# Altium PCB BugBuster_DAQ.PcbDoc (part 1 of 5)
Units mm, origin at the board's own origin, x right, y up, seen from the top; angles counter-clockwise.
Board outline 110 x 80 mm, 6 copper layers (Top Layer, Inner Layer 1, Inner Layer 2, Inner Layer 3, Inner Layer 4, Bottom Layer), stack 1.202 mm thick; 245 components, 205 nets, 1250 pads, 1565 vias.
Unrouted connection lines stored in the file: 8.
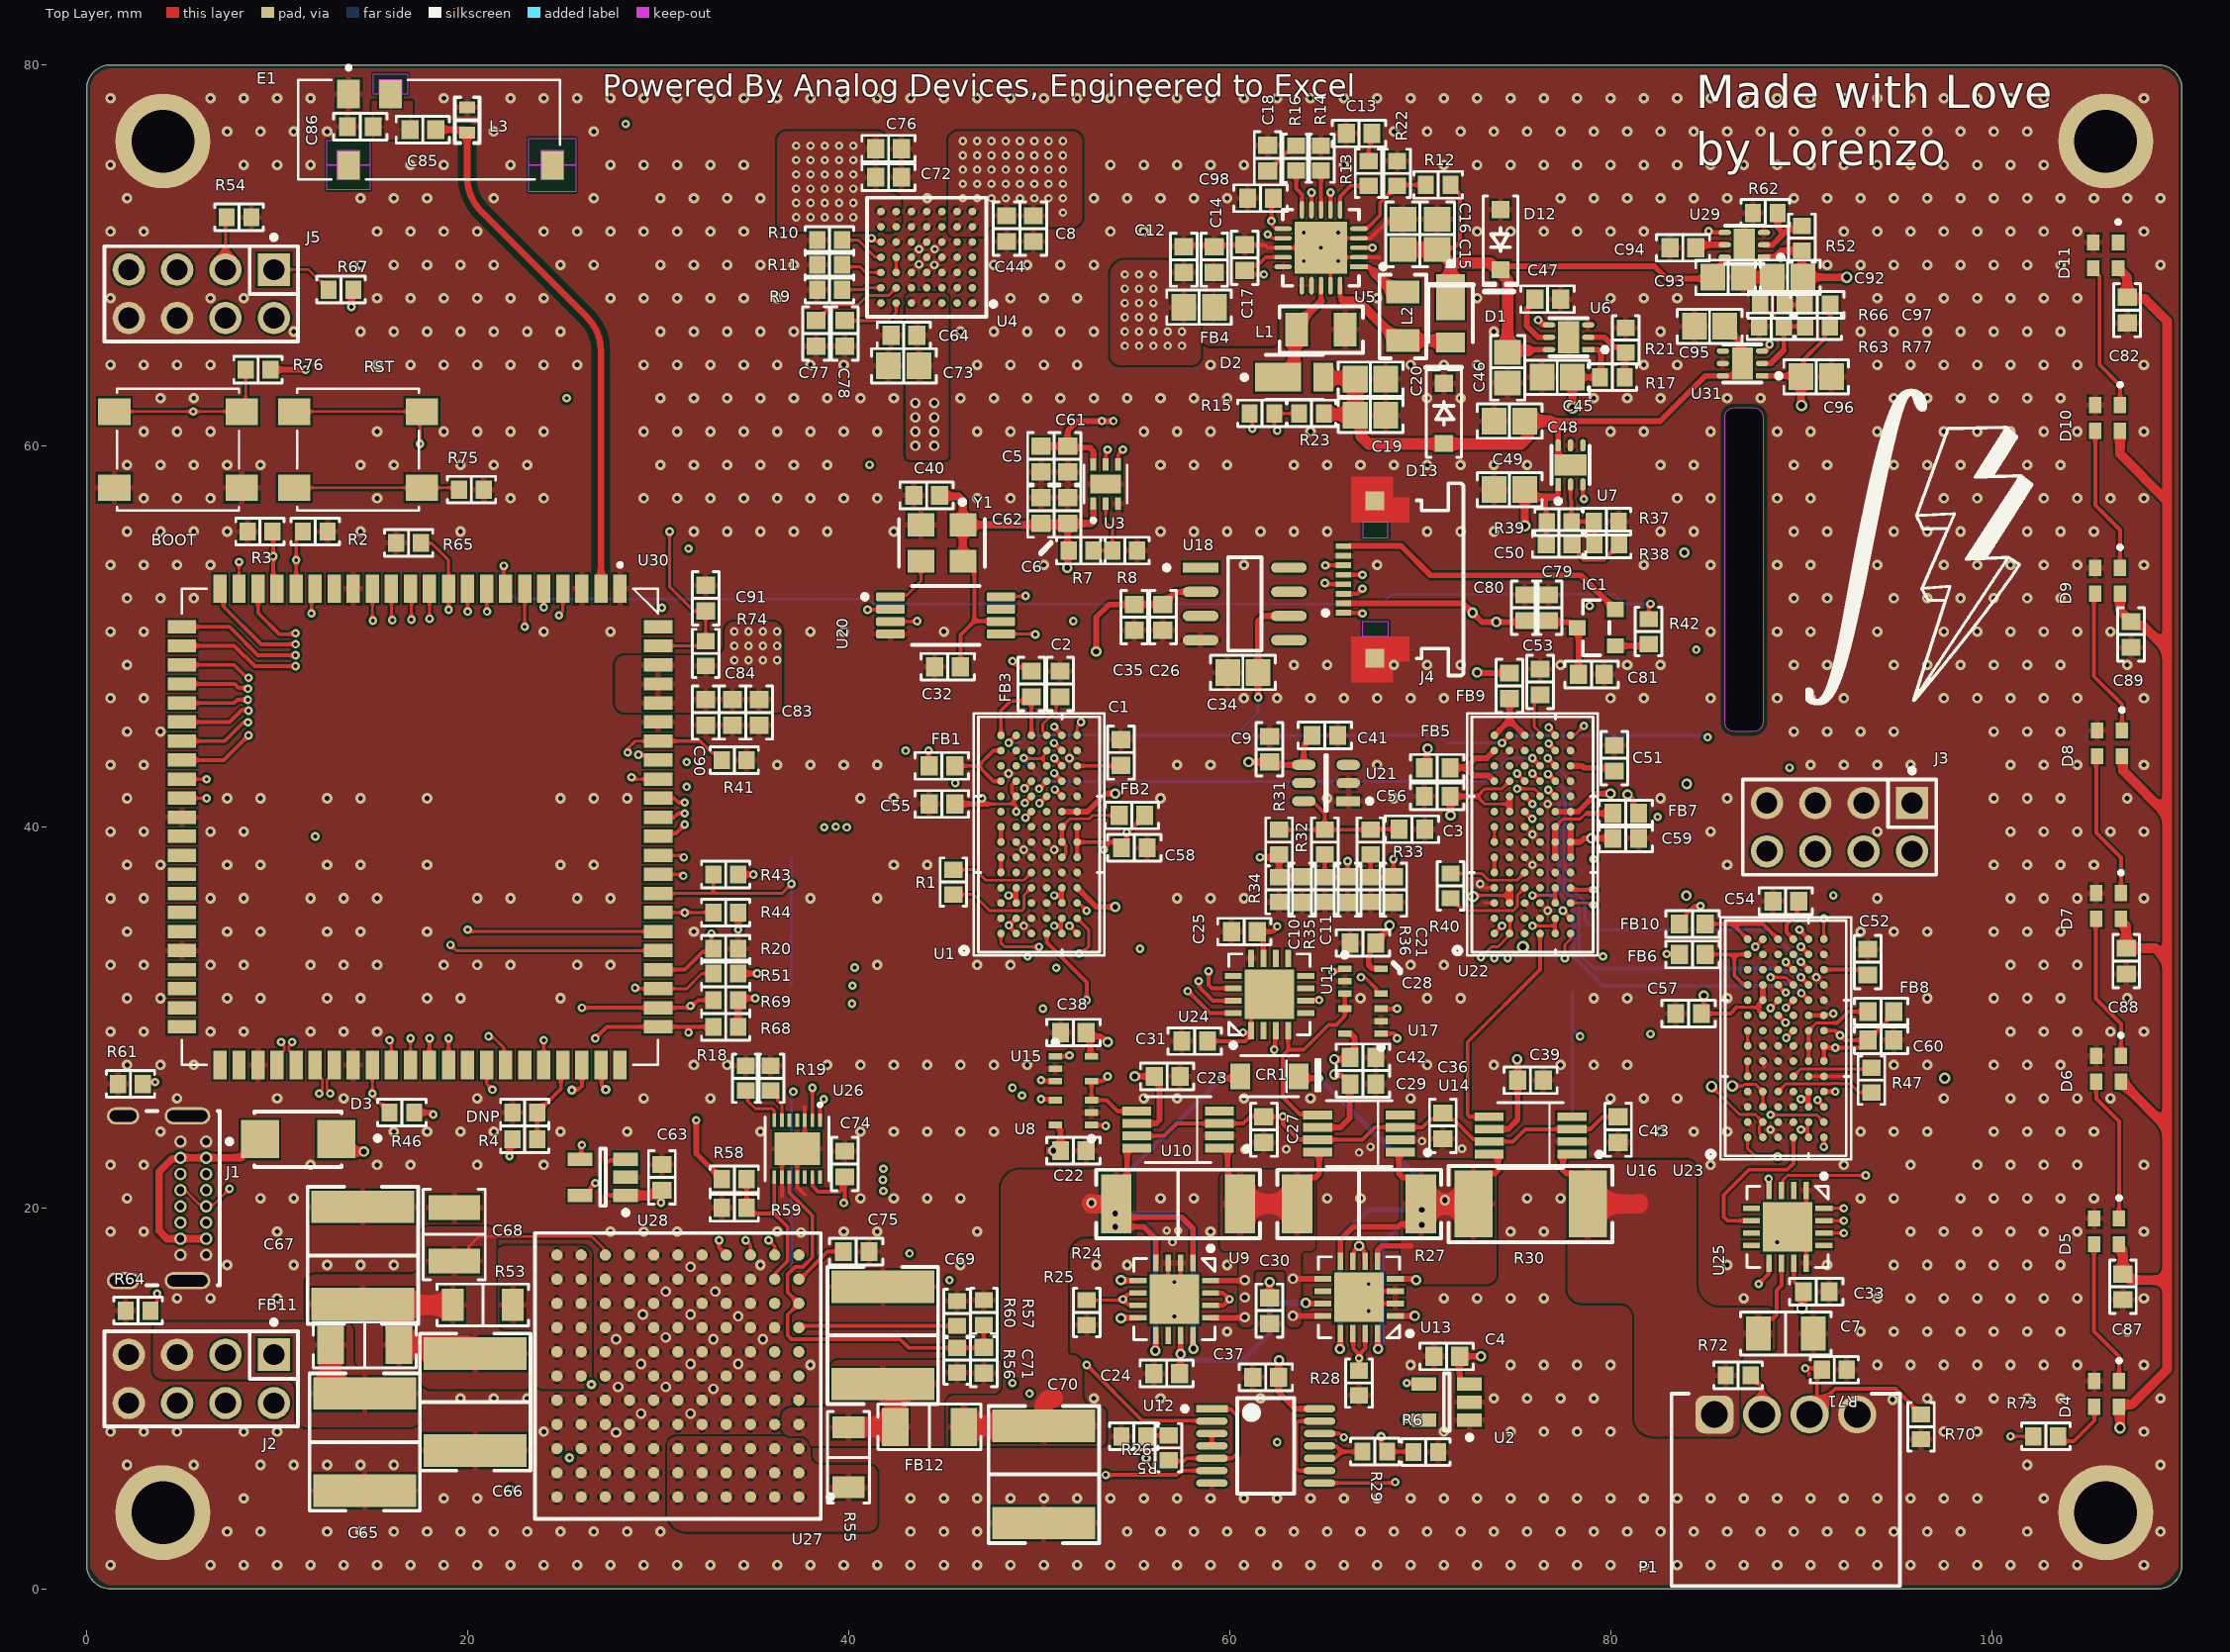
[diagram p0: Top Layer view]
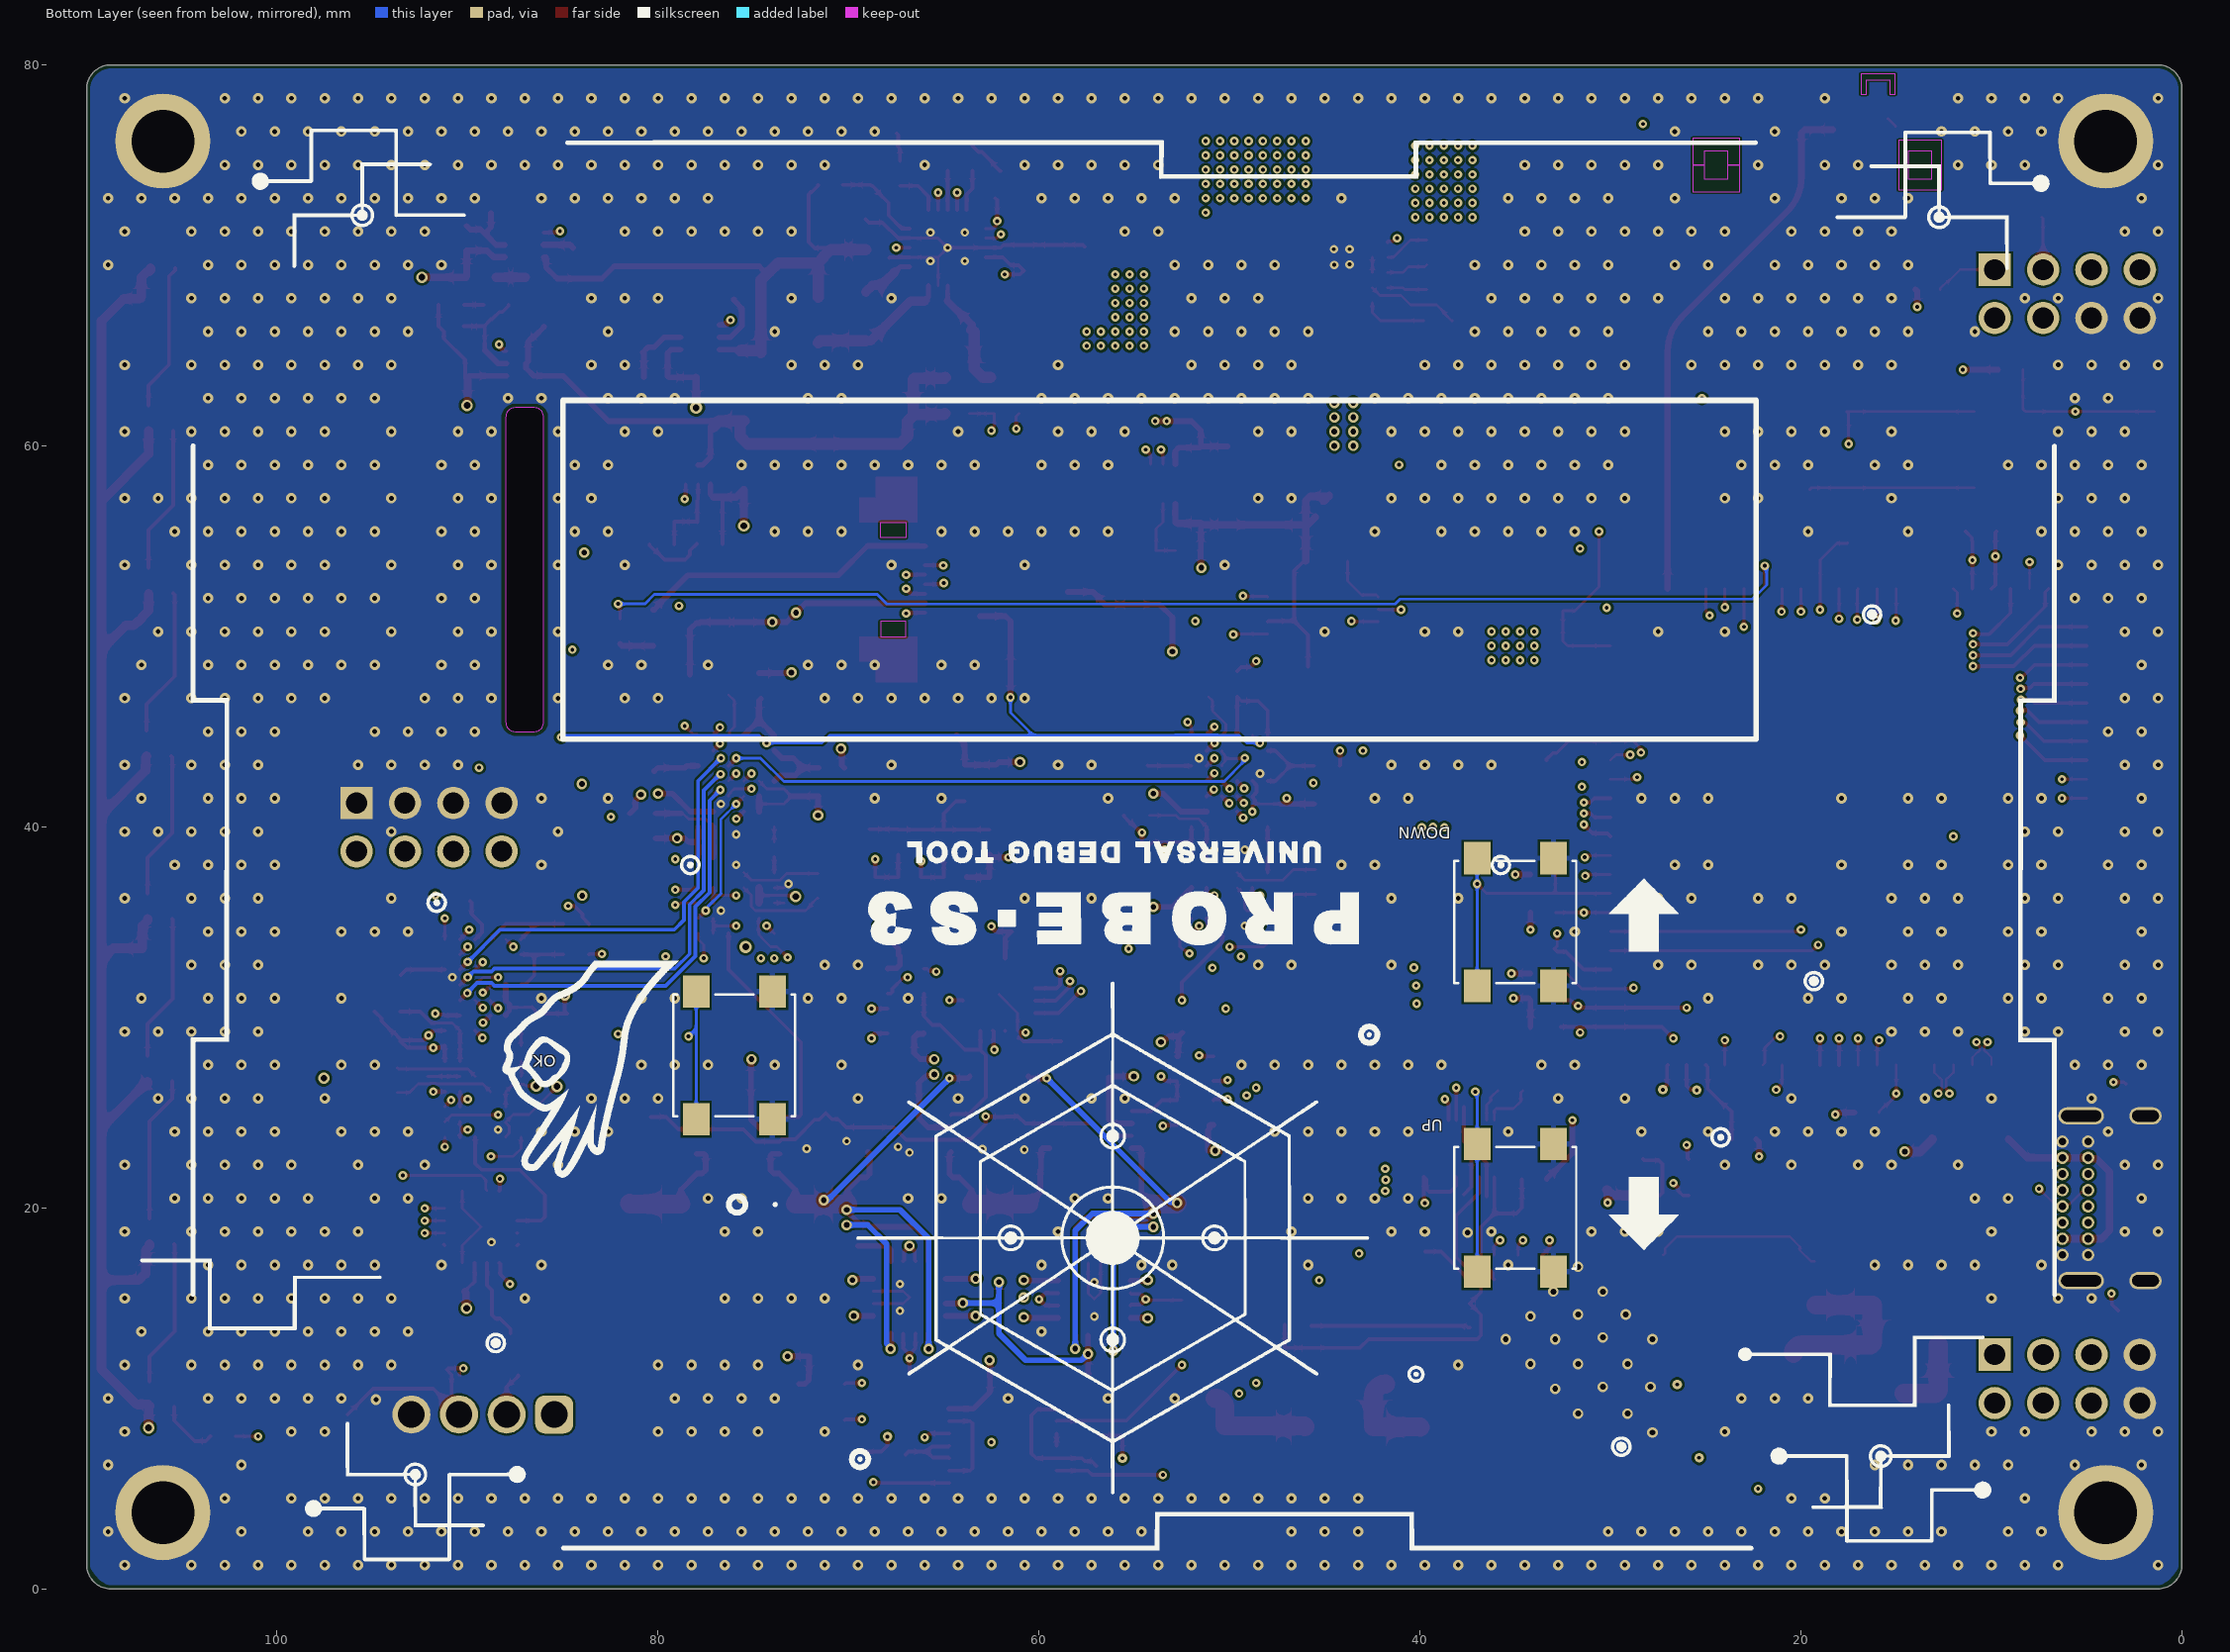
[diagram p1: Bottom Layer view, seen from below]
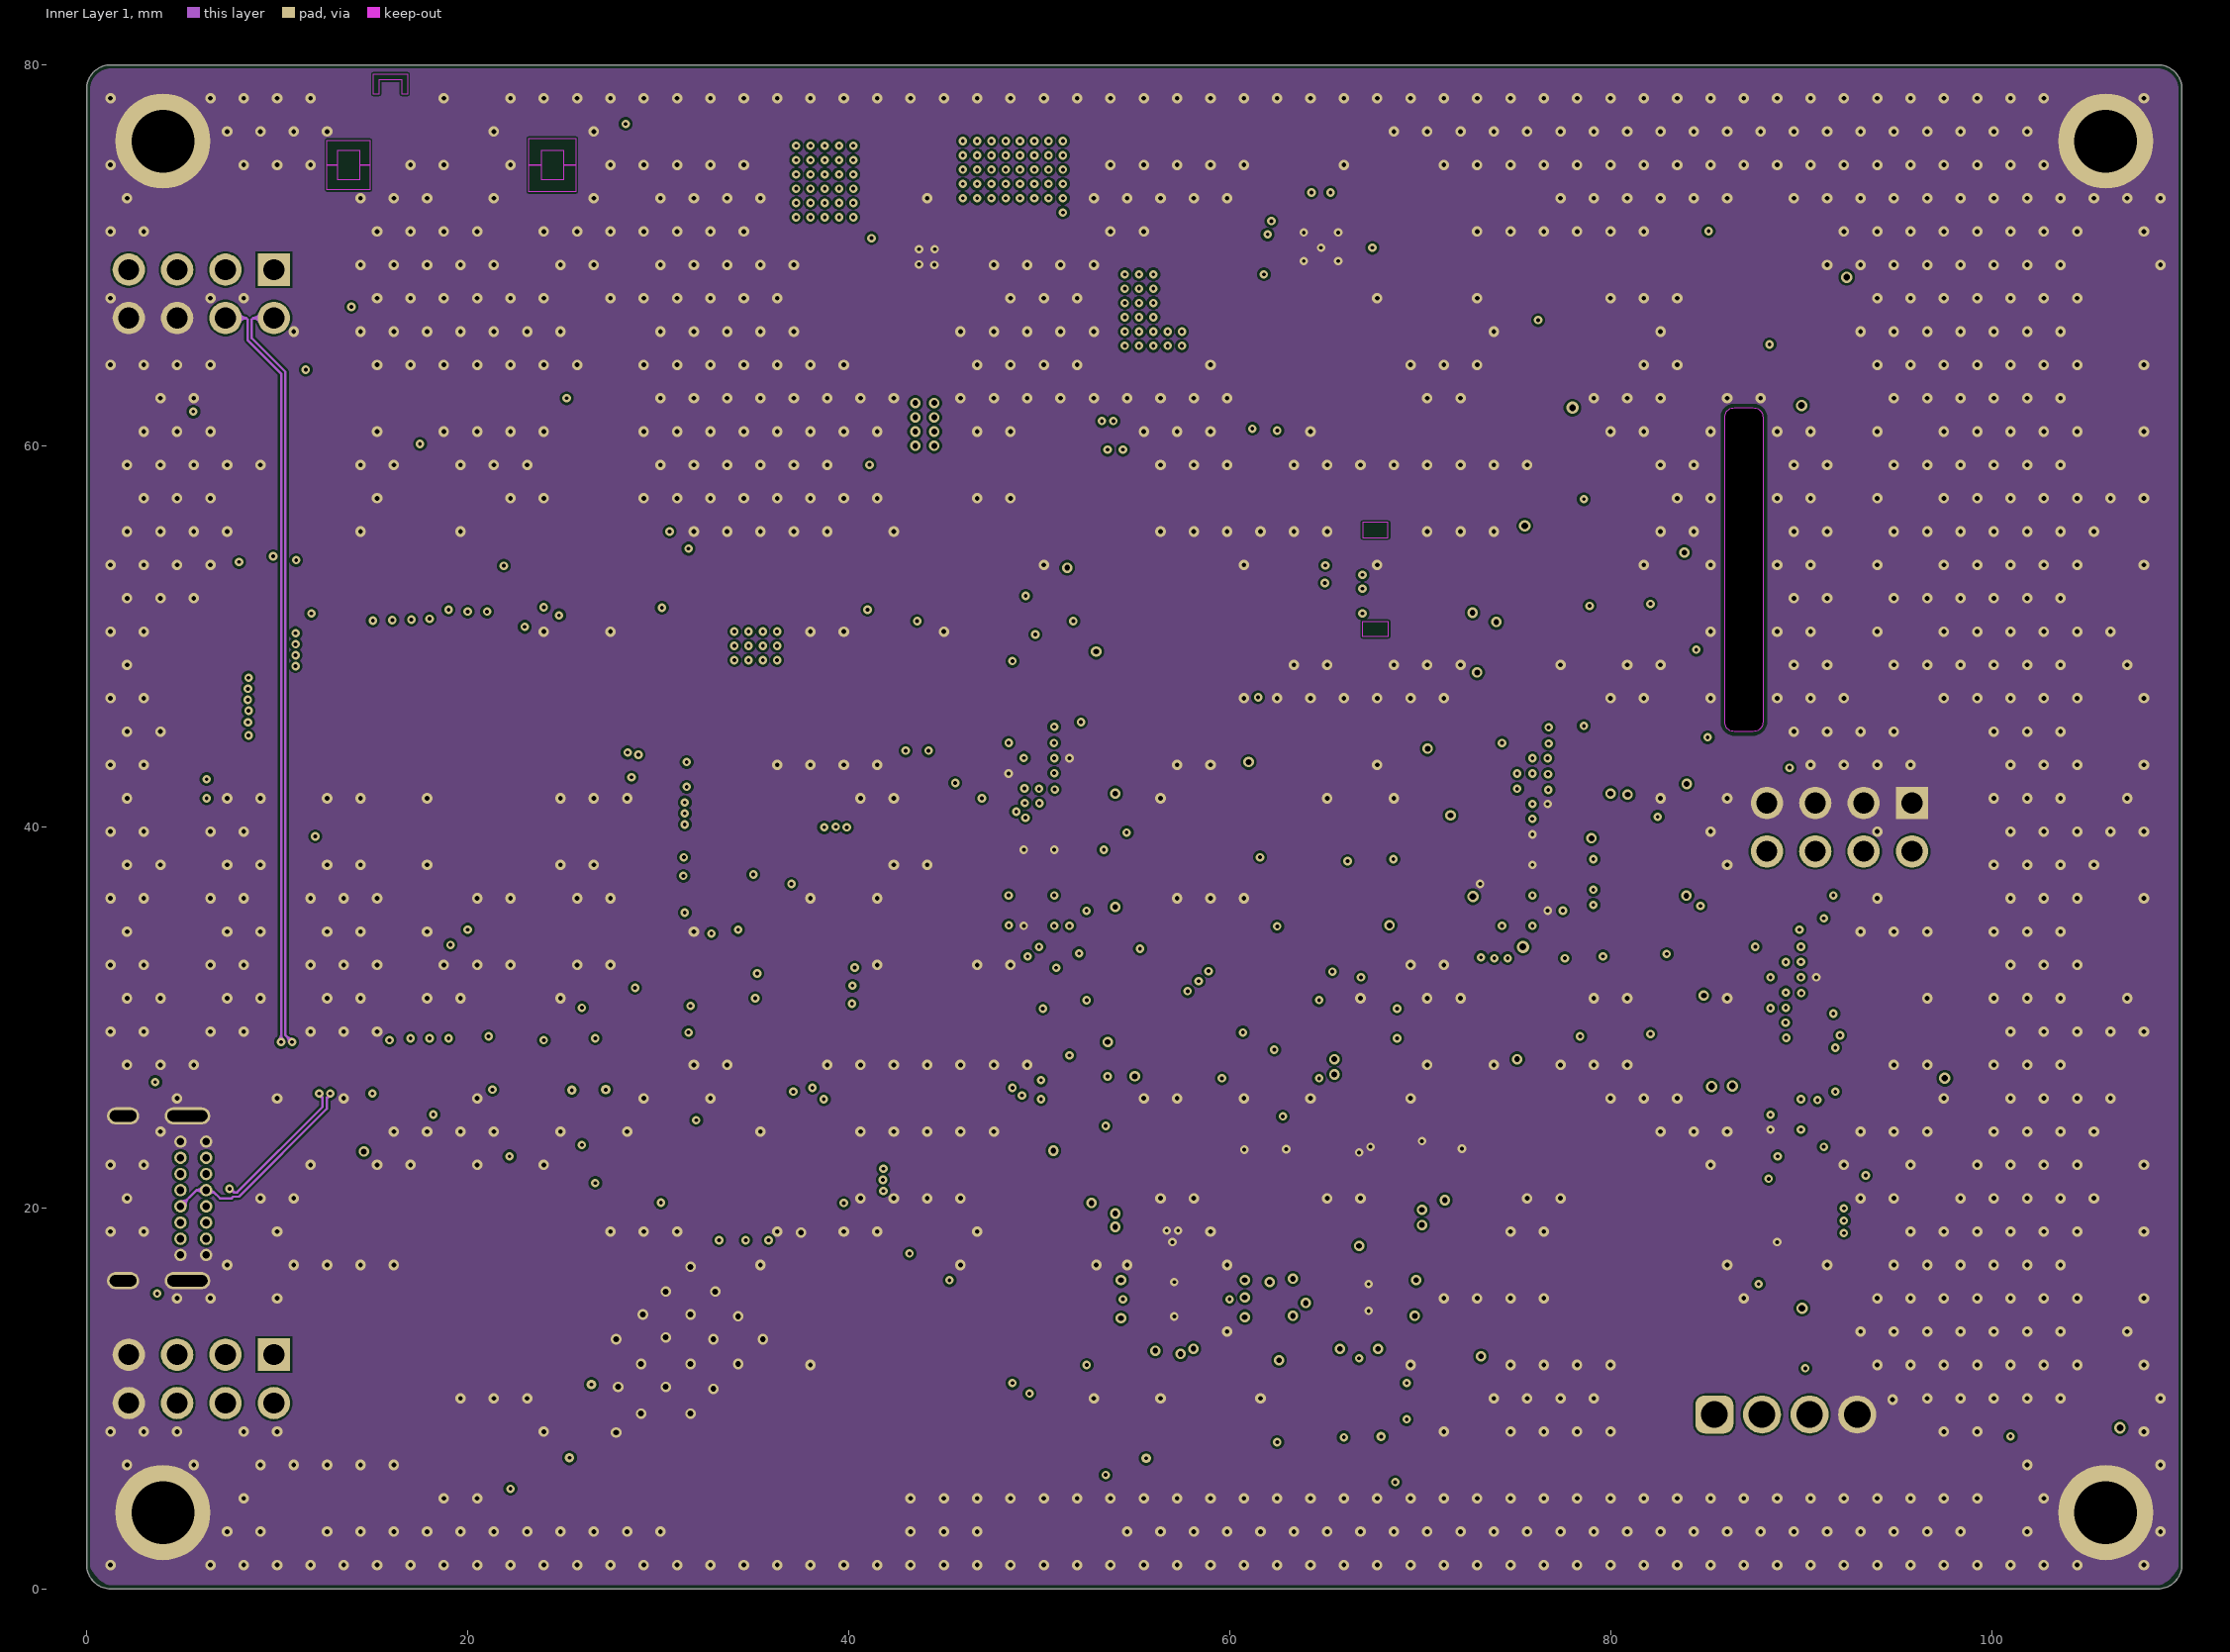
[diagram p2: Inner Layer 1]
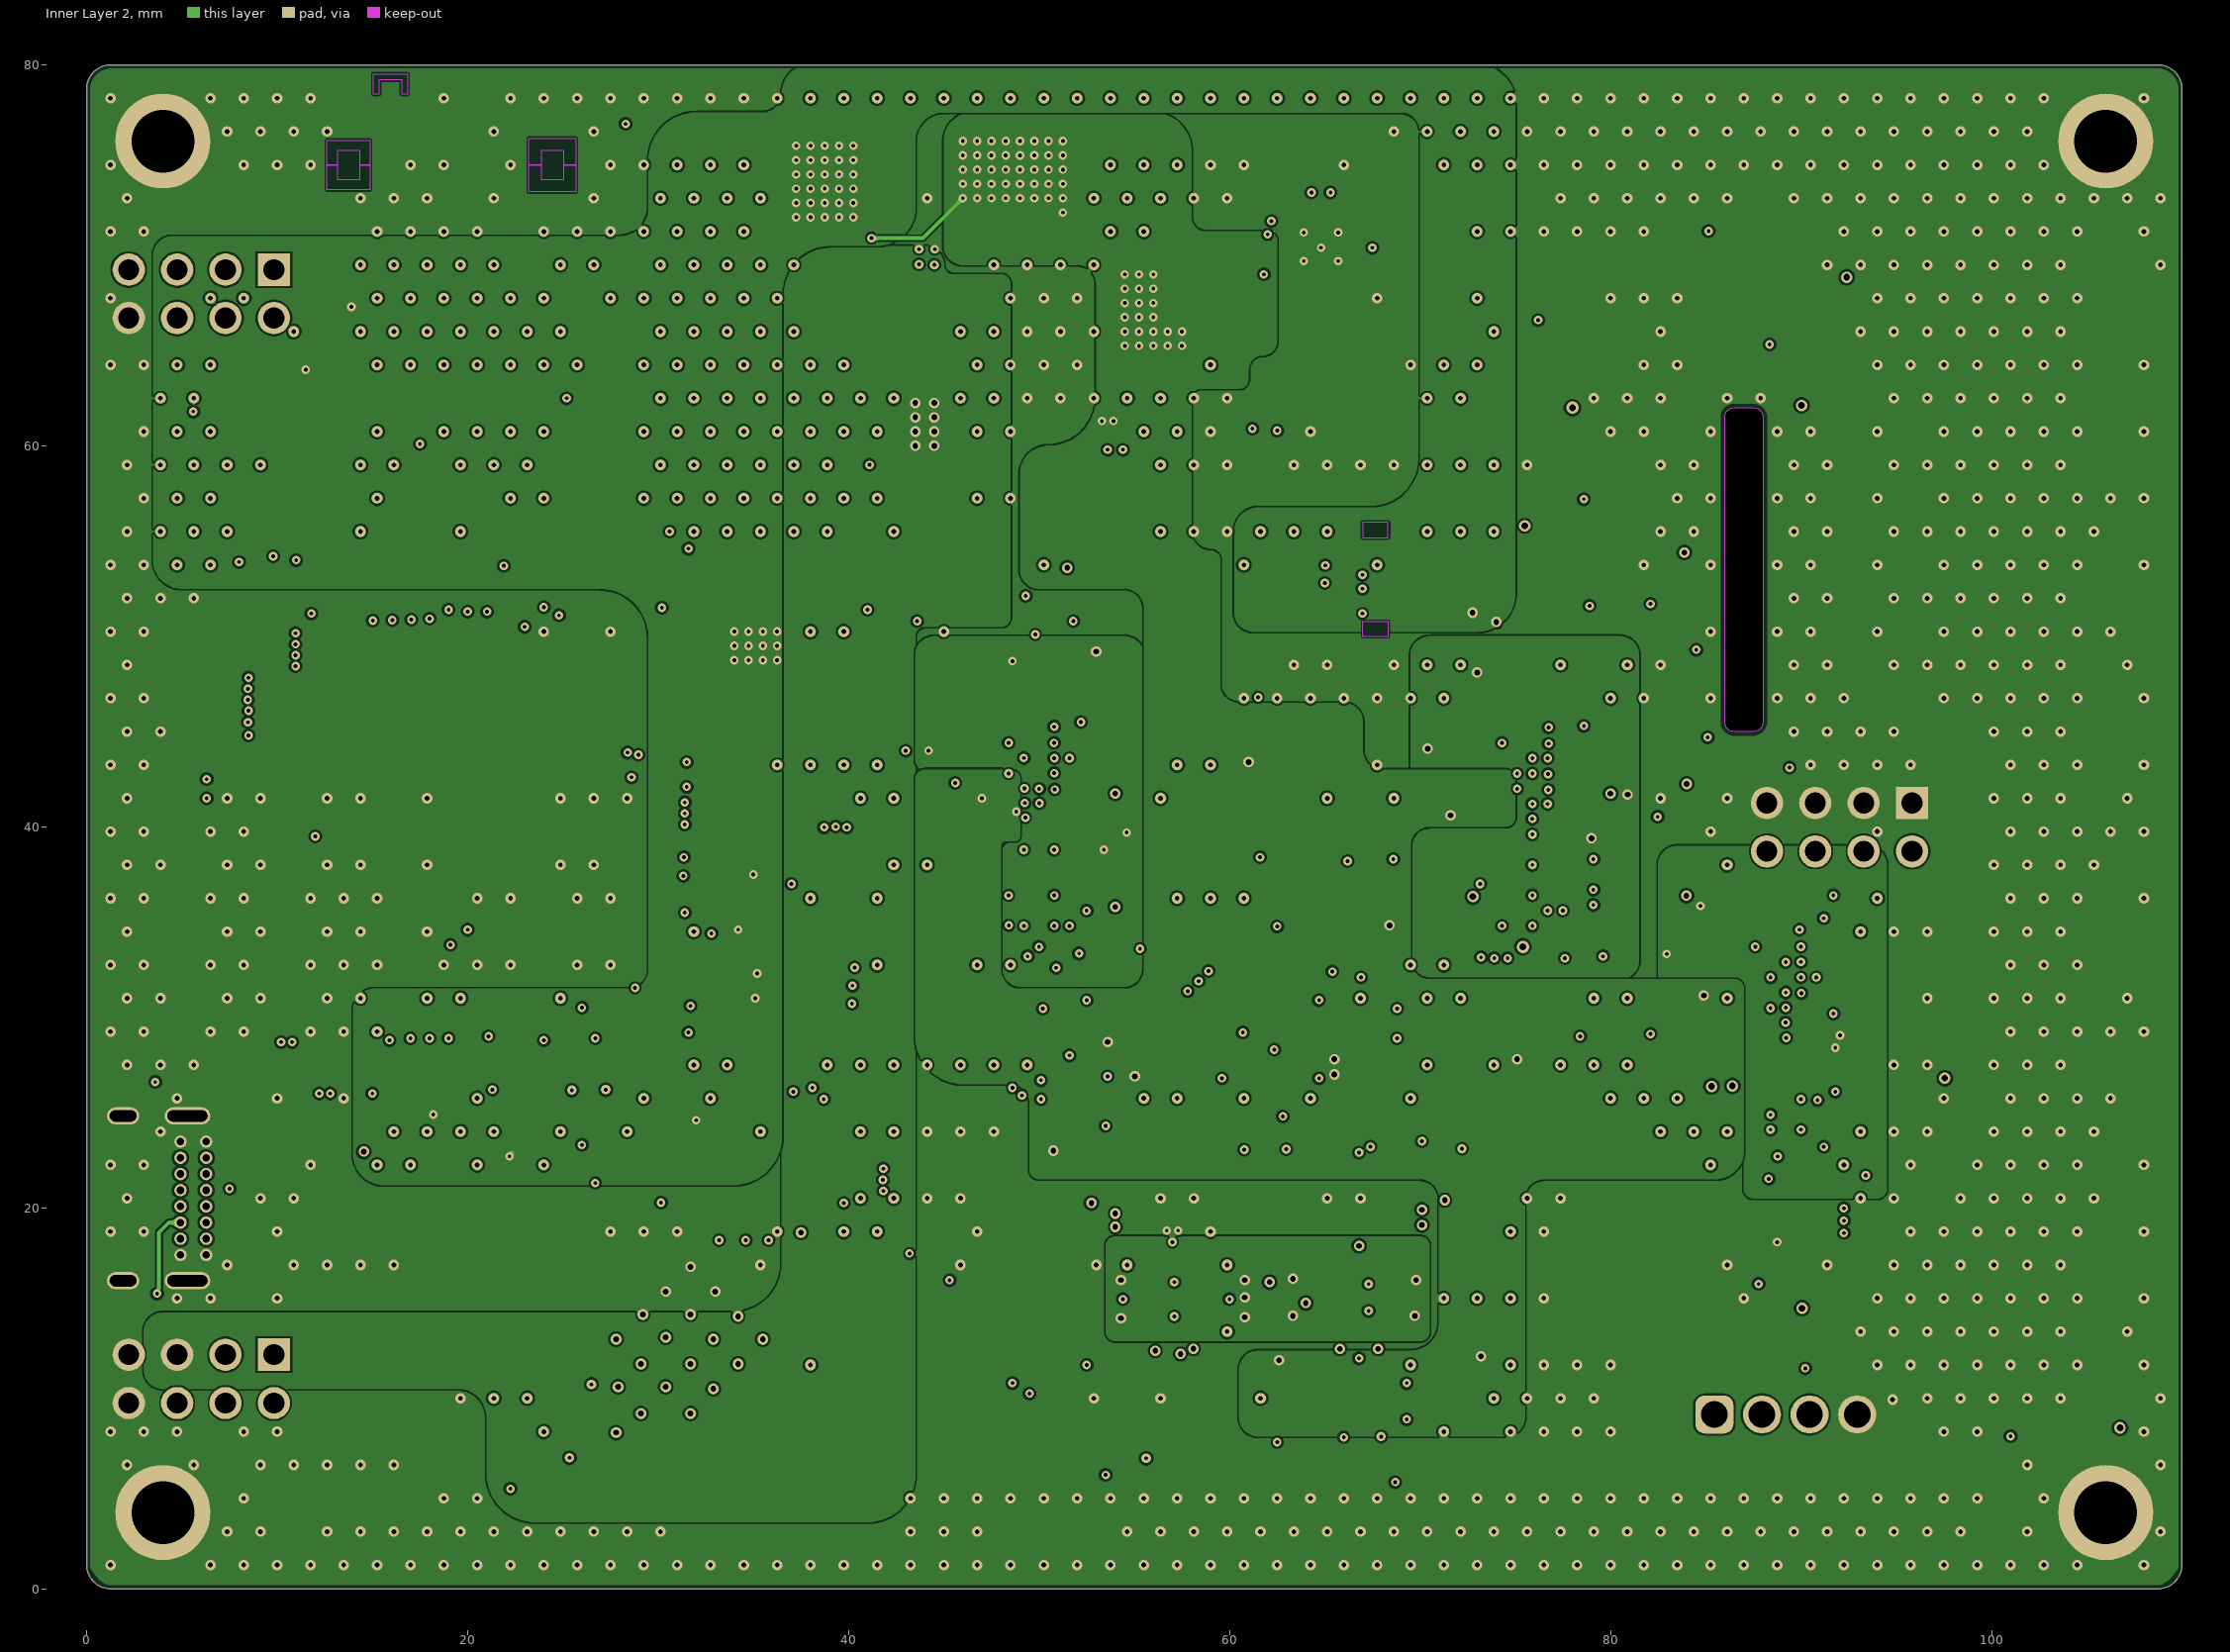
[diagram p3: Inner Layer 2]
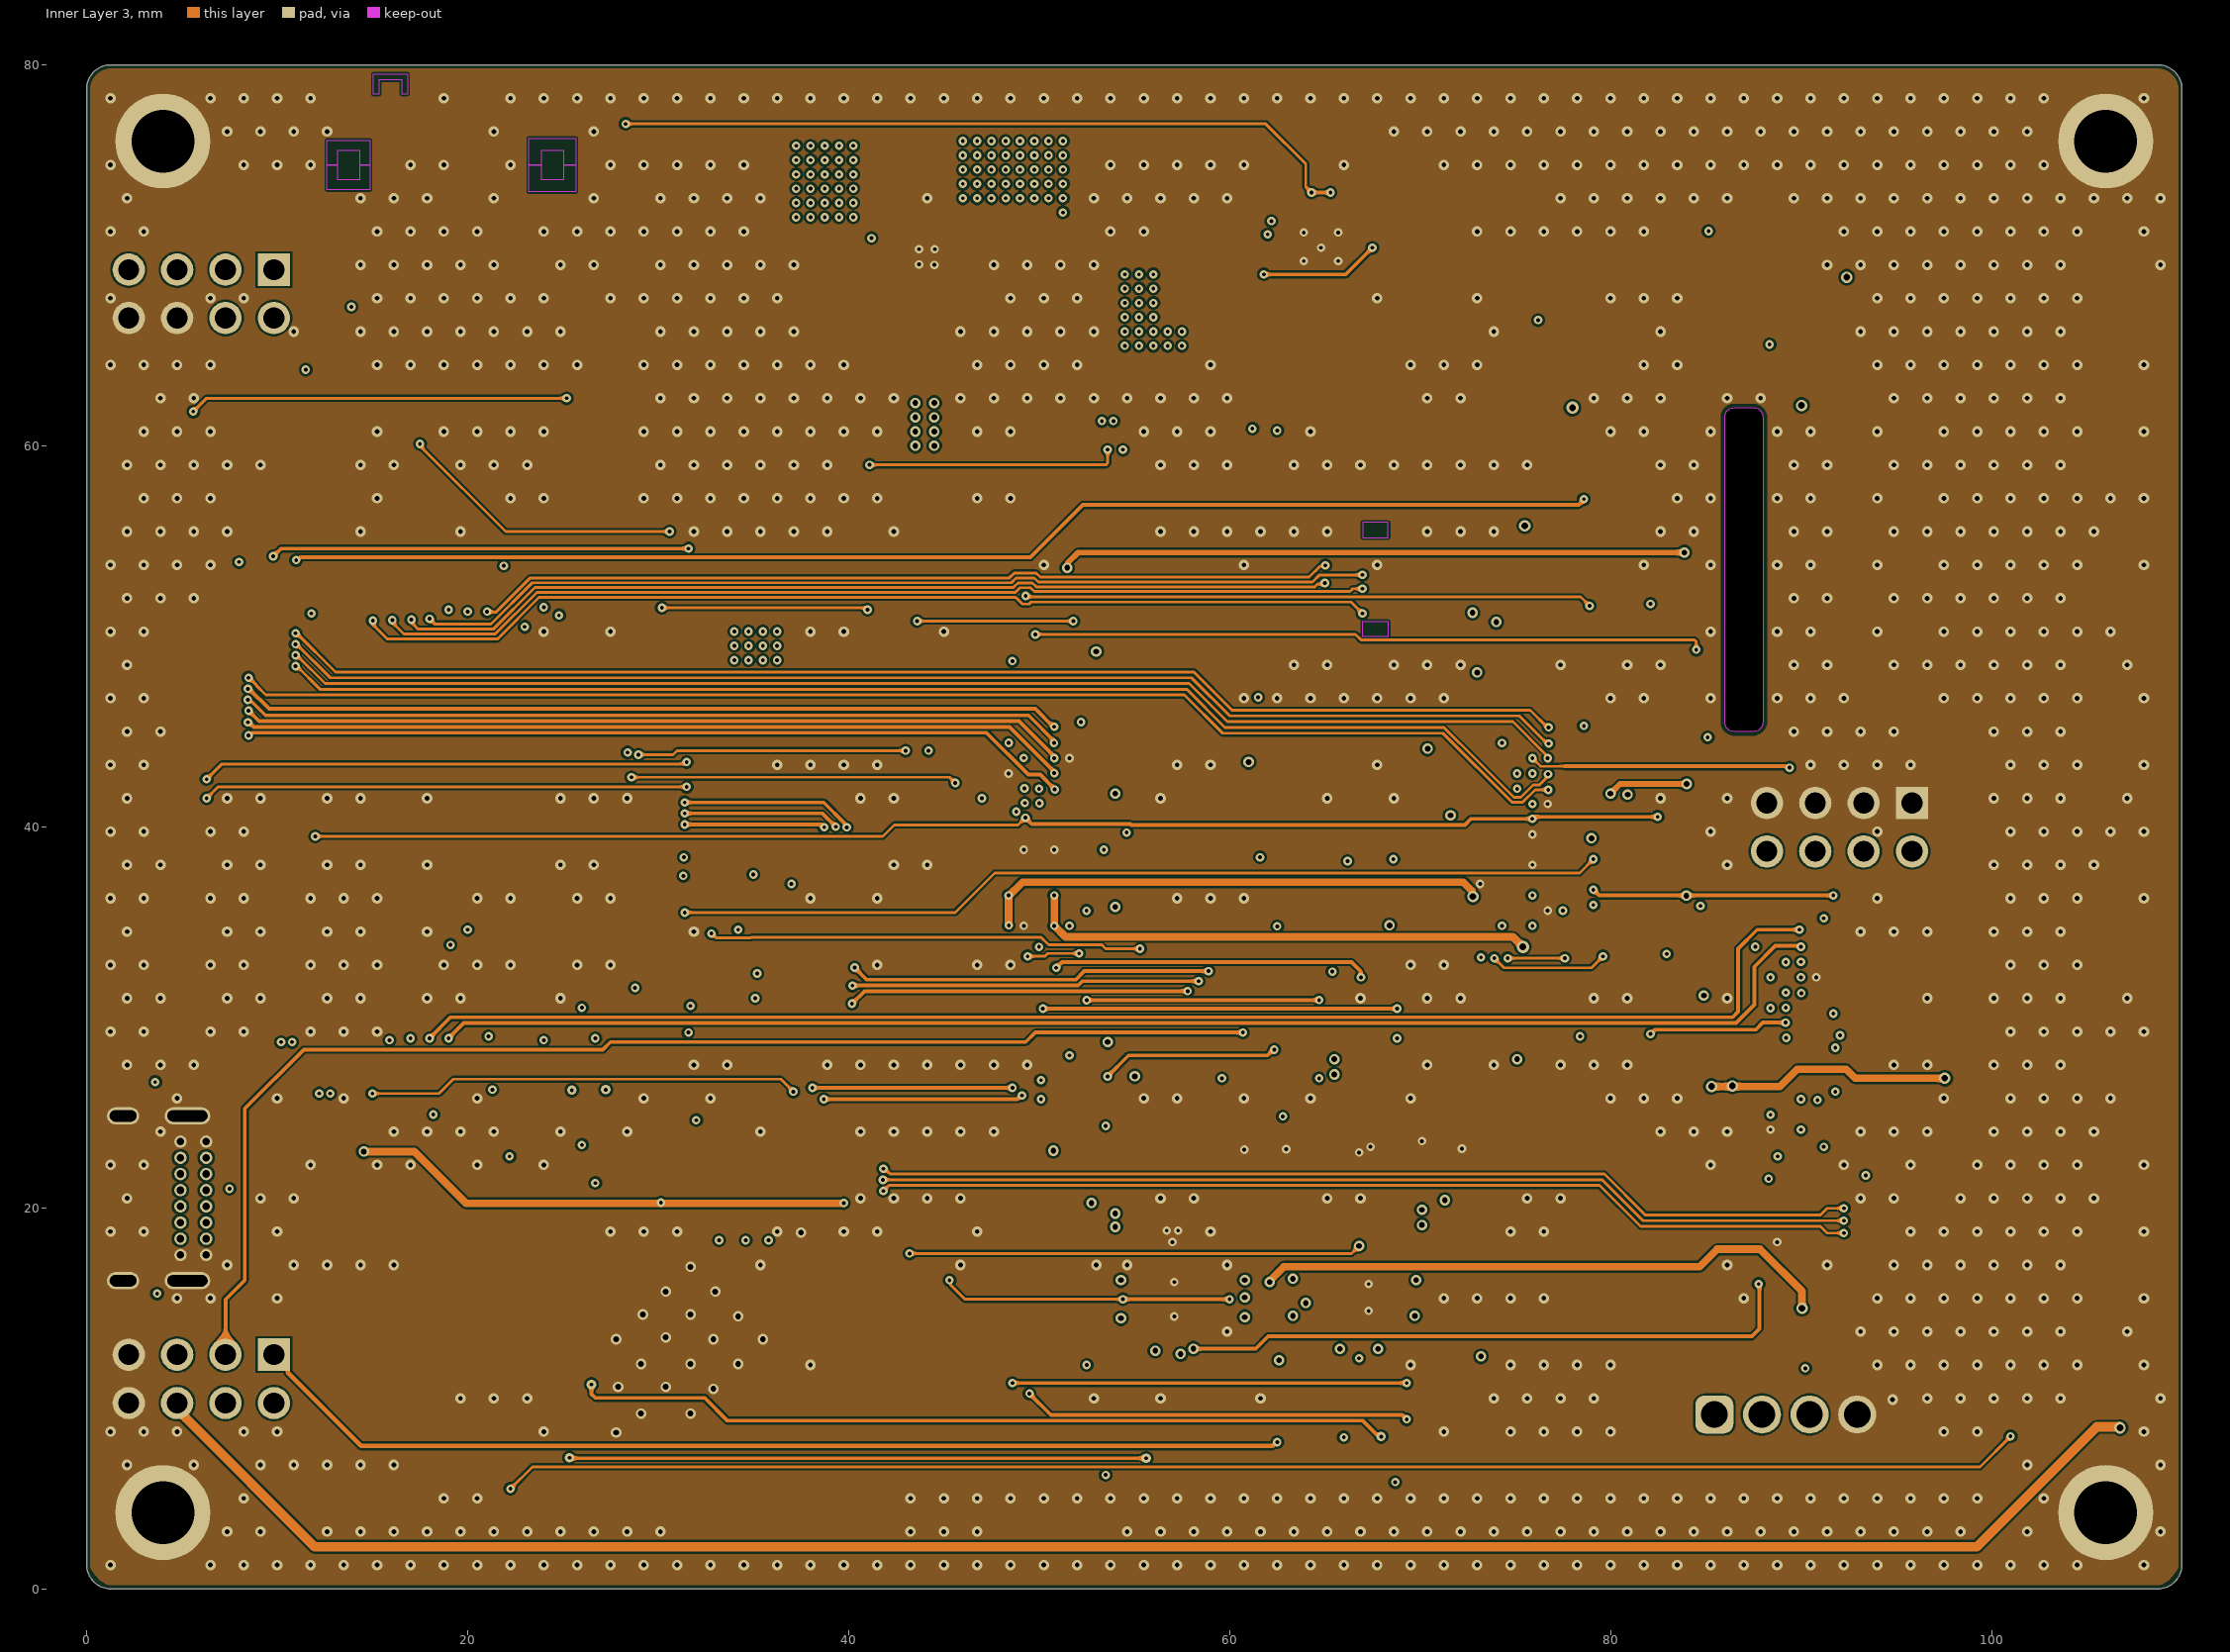
[diagram p4: Inner Layer 3]
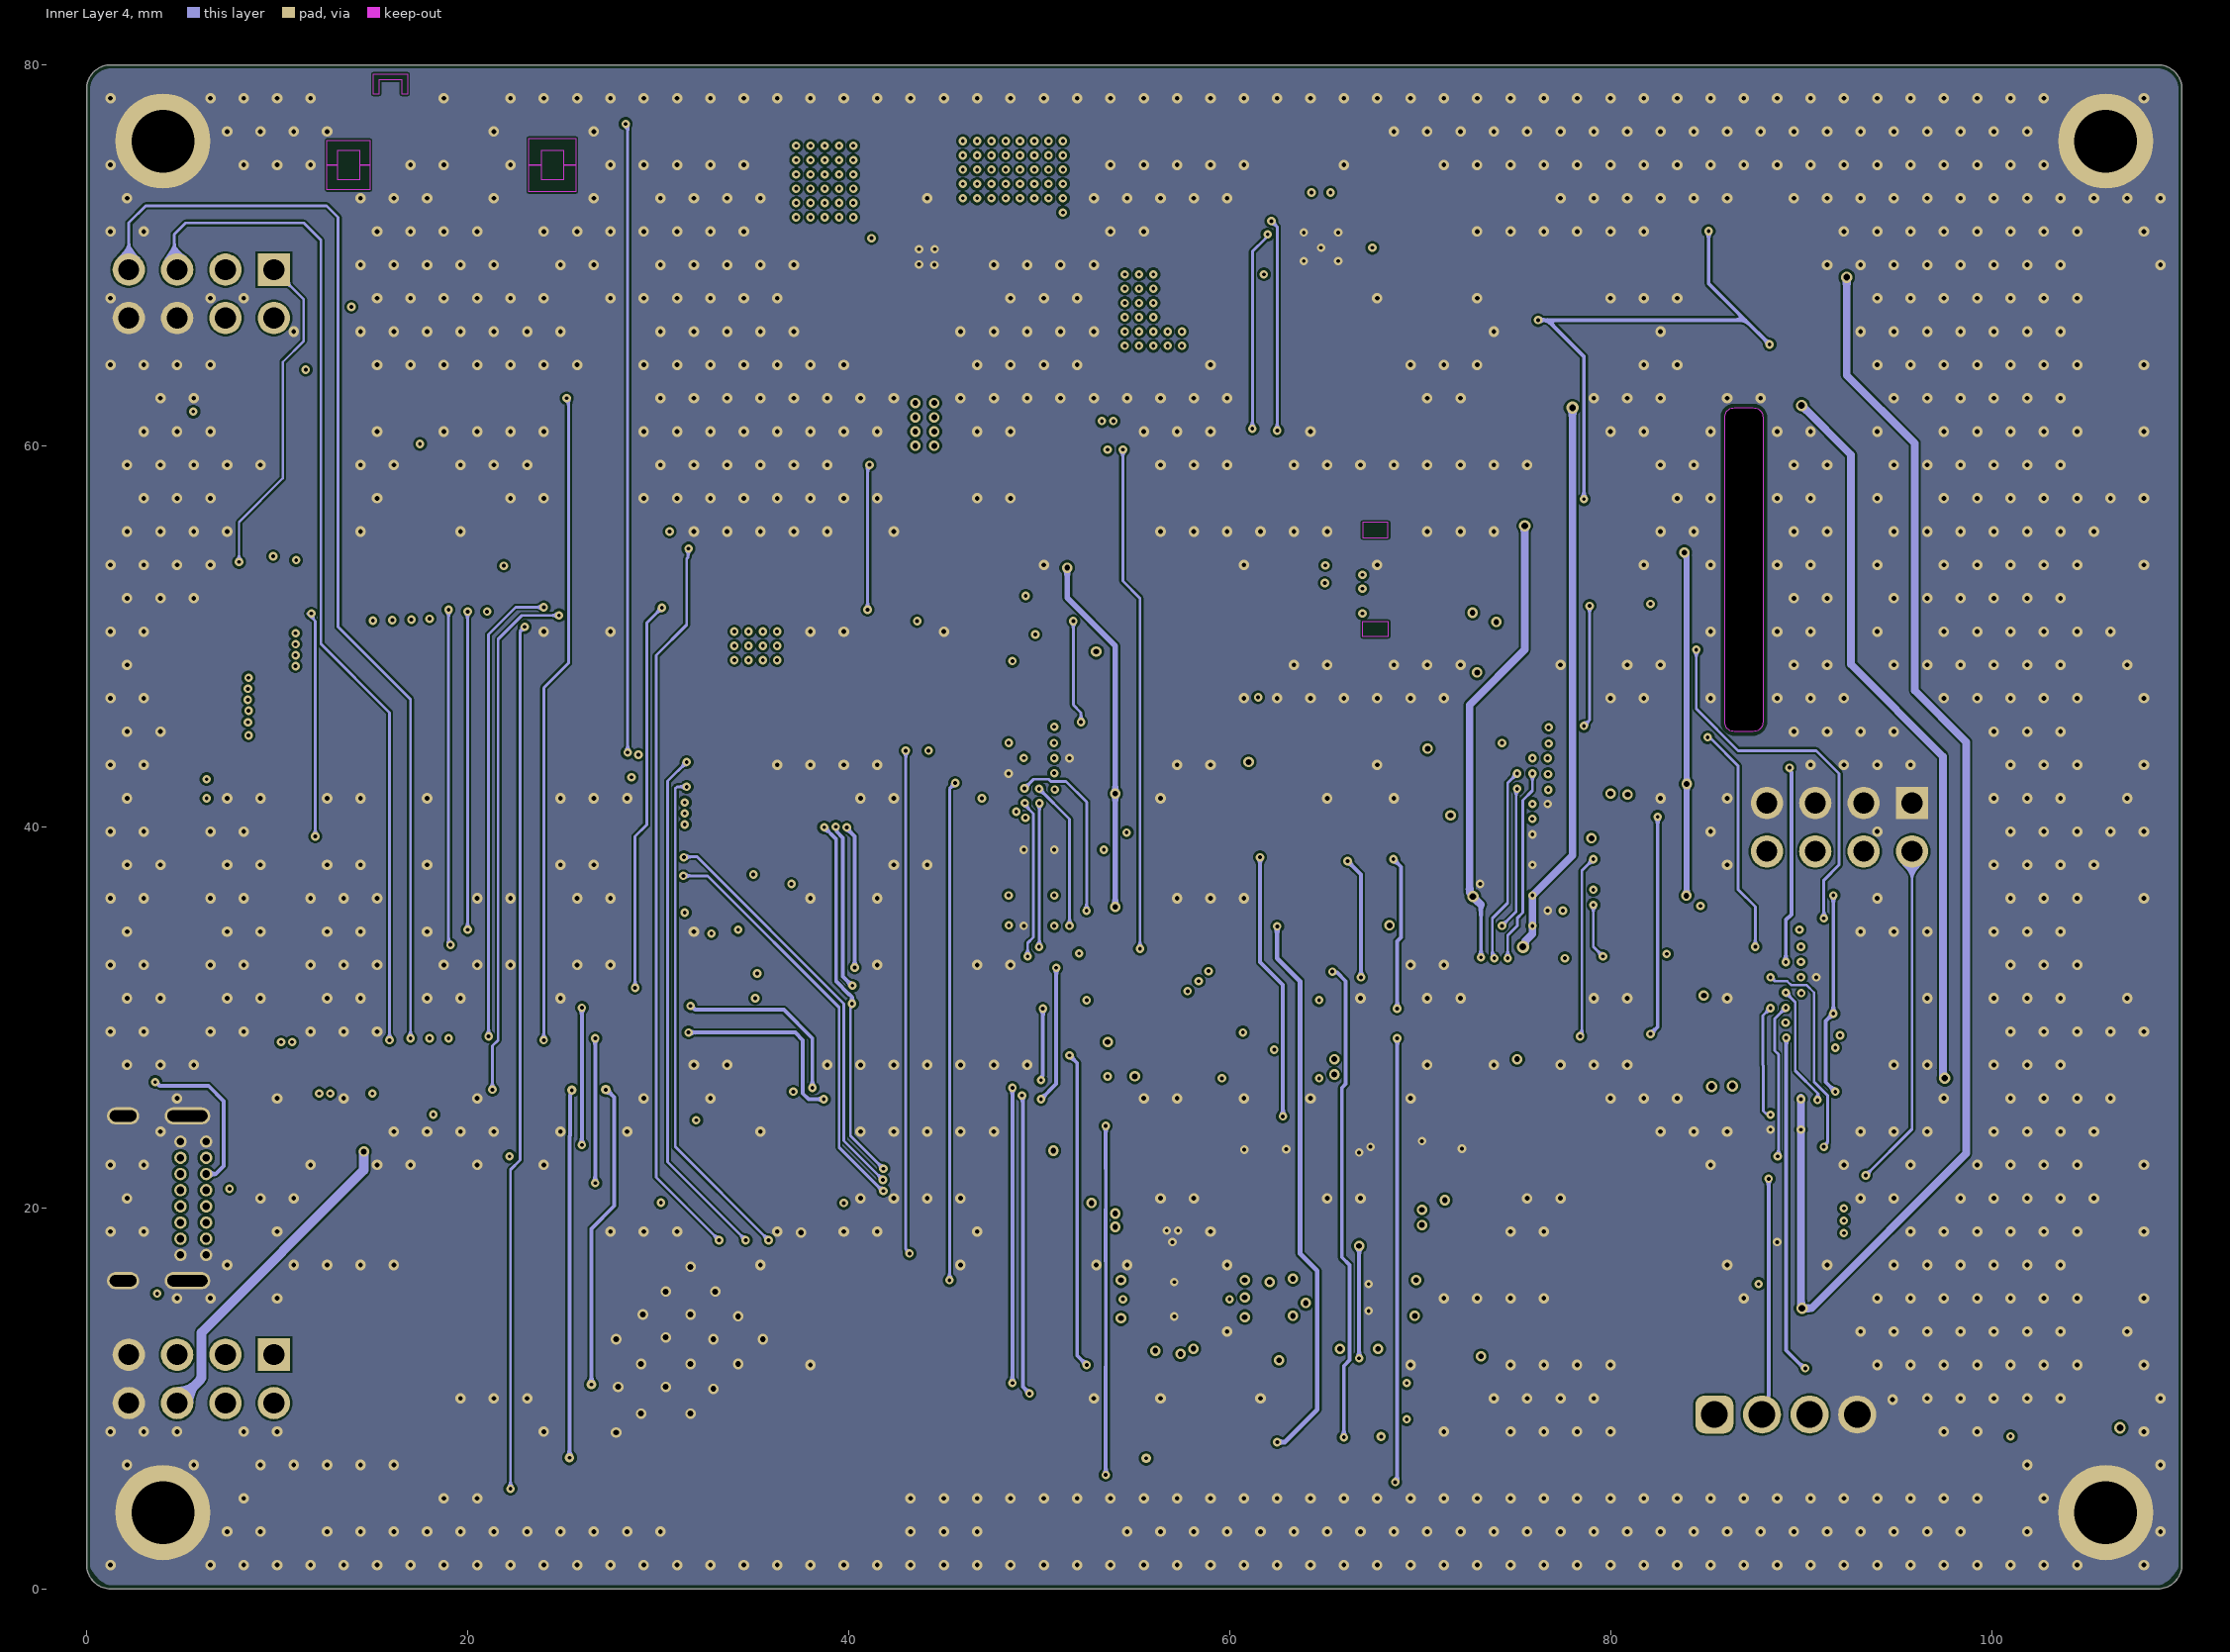
[diagram p5: Inner Layer 4]
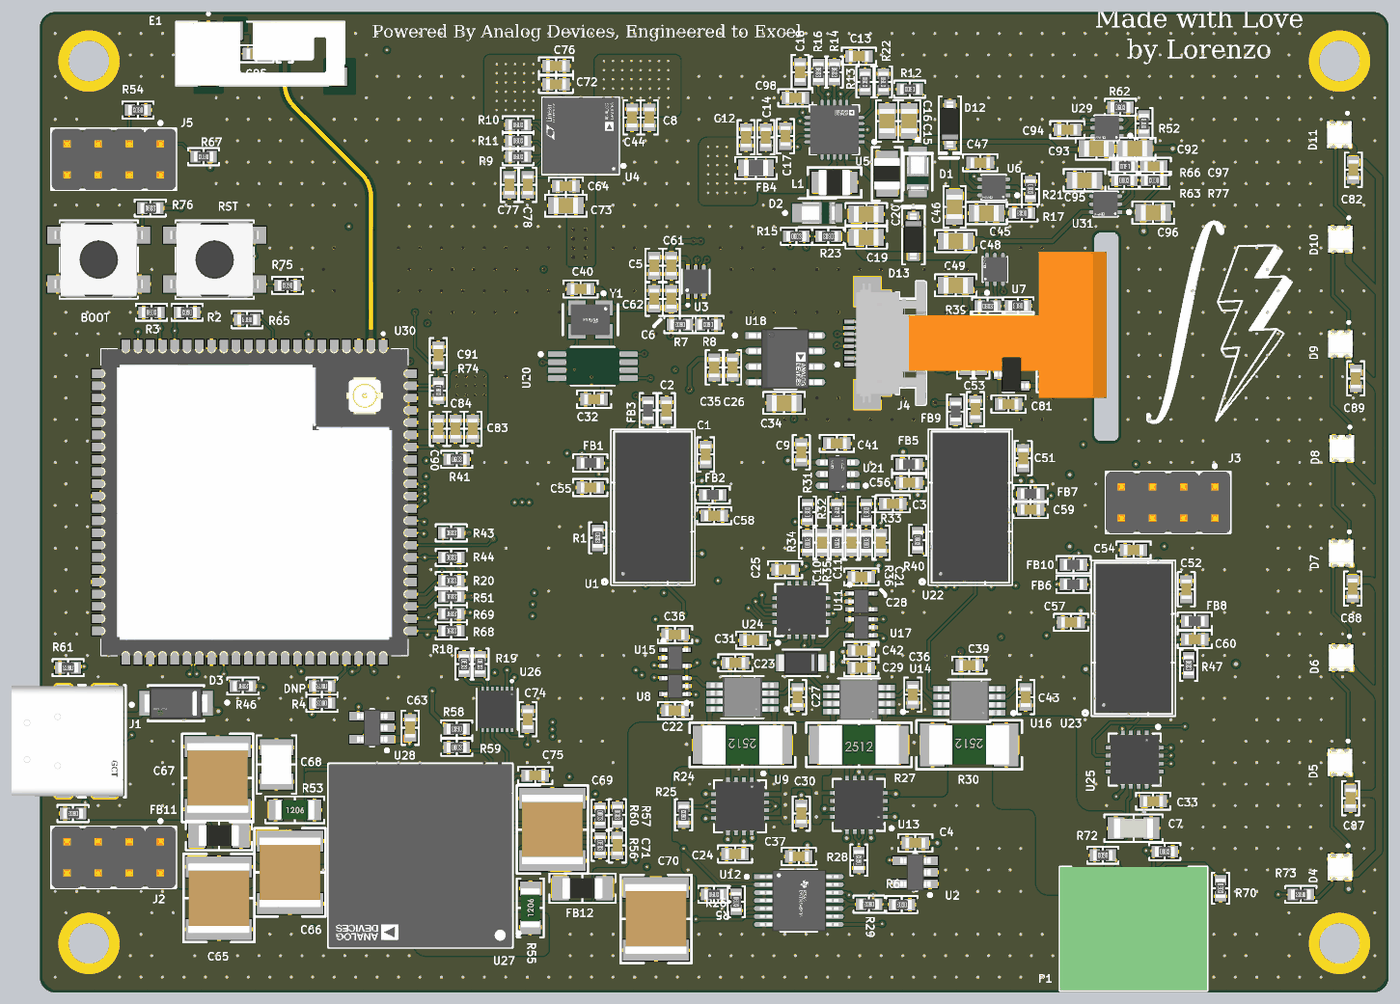
[diagram p9: 3D render of the assembled board from above, using the file's embedded part models]
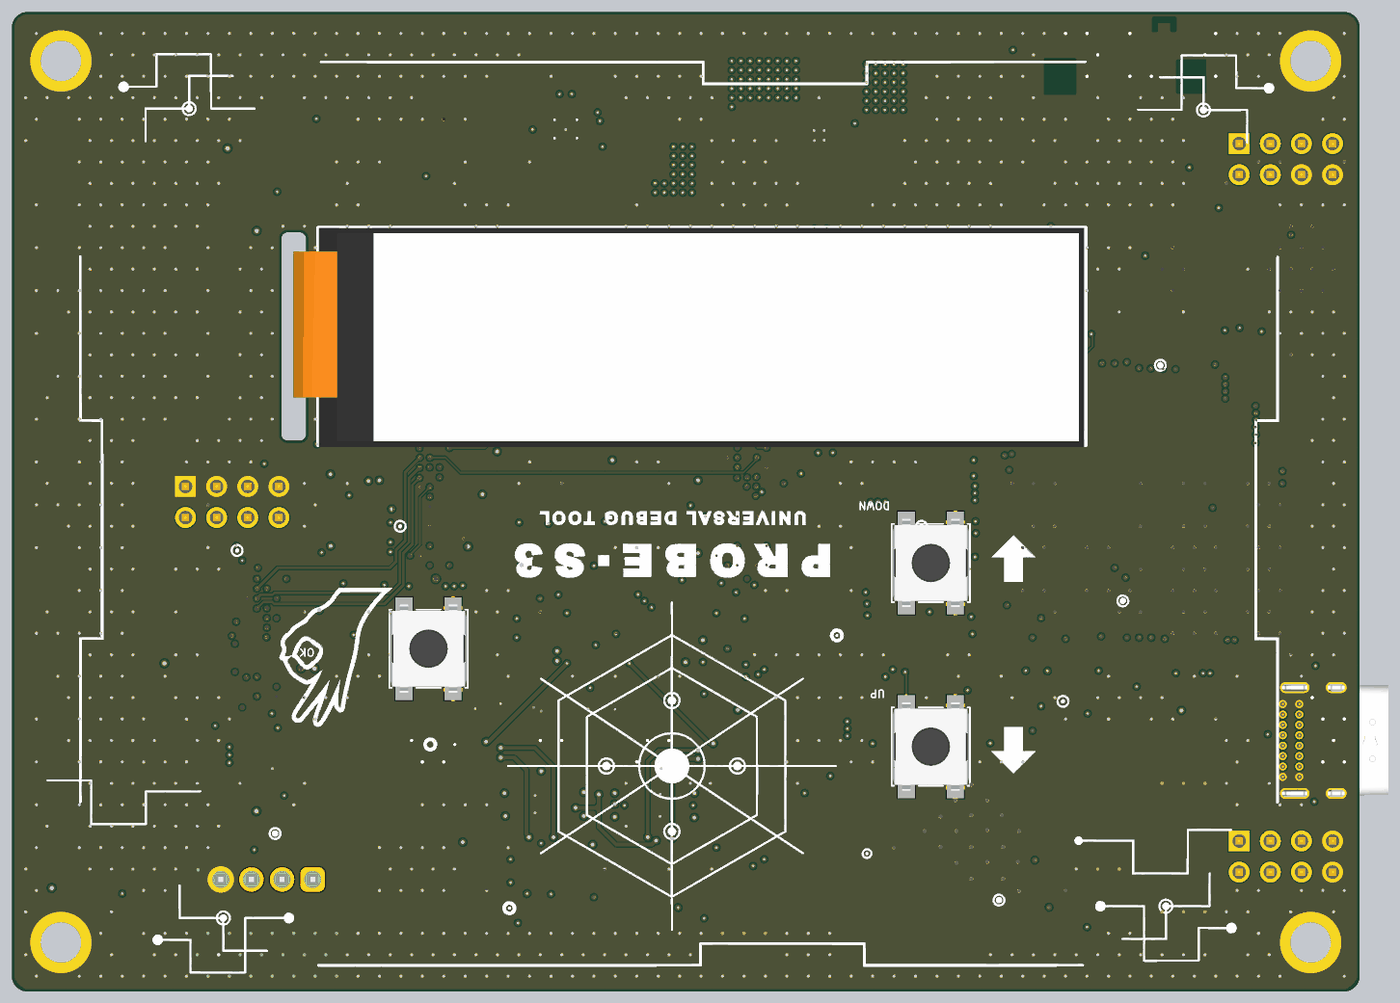
[diagram p10: 3D render of the assembled board from below, using the file's embedded part models]

## Layer stack, top to bottom
Top Solder: solder mask 0.0152, Solder Resist, Dk 3.8
Top Layer: signal copper 0.035
Dielectric 1: prepreg 0.203, NP-155F, Dk 4.4
Inner Layer 1: signal copper 0.03
Dielectric 2: core 0.1, NP-155F, Dk 4.6
Inner Layer 2: signal copper 0.03
Dielectric 3: prepreg 0.203, NP-155F, Dk 4.4
Dielectric 6: prepreg 0.203, NP-155F, Dk 4.4
Inner Layer 3: signal copper 0.03
Dielectric 4: core 0.1, NP-155F, Dk 4.6
Inner Layer 4: signal copper 0.03
Dielectric 5: prepreg 0.203, NP-155F, Dk 4.4
Bottom Layer: signal copper 0.035
Bottom Solder: solder mask 0.0152, Solder Resist, Dk 3.8

## Board outline
1.27,0 cw(c1.27,1.27) 0,1.27 0,78.73 cw(c1.27,78.73) 1.27,80 108.73,80 cw(c108.73,78.73) 110,78.73 110,1.27 cw(c108.73,1.27) 108.73,0

## Design rules (kind name [scope] priority, off if disabled: settings)
BoardOutlineClearance [All] p1: gap=0.2 ignorepadtopadclearanceinfootprint=FALSE
Clearance Clearance_1 [InNet('NetC85_2')] p1: gap=0.102 ignorepadtopadclearanceinfootprint=FALSE except(0.127: Arc-Via Track-Via SMDPad-Via THPad-Via Via-Via Via-Fill Via-Poly Via-Region Via-Text; 0.25: Arc-Hole Track-Hole SMDPad-Hole THPad-Hole Via-Hole Fill-Hole Poly-Hole Region-Hole Text-Hole; 0.3: Arc-Fill Arc-Poly Arc-Region Track-Fill Track-Poly Track-Region)
Clearance "Stitching GND" [IsStitchingVia and InNet('GND') vs (IsVia and (Not IsStitchingVia)) Or IsPad] p2: gap=0.2 ignorepadtopadclearanceinfootprint=FALSE
Clearance [All] p3: gap=0.102 ignorepadtopadclearanceinfootprint=FALSE except(0.127: Arc-Via Track-Via SMDPad-Via THPad-Via Via-Via Via-Fill Via-Poly Via-Region Via-Text; 0.25: Arc-Hole Track-Hole SMDPad-Hole THPad-Hole Via-Hole Fill-Hole Poly-Hole Region-Hole Text-Hole)
ComponentClearance [All] p1: gap=0.102 collisioncheckmode=3 verticalgap=0.102 showdistances=TRUE
DiffPairsRouting [All] p1: maxlimit=0.102 minlimit=0.102 mostfreqgap=0.102 toplayer_minwidth=0.102 toplayer_maxwidth=1816.048 toplayer_prefwidth=0.102 midlayer1_minwidth=0.102 midlayer1_maxwidth=1816.048 midlayer1_prefwidth=0.102 midlayer2_minwidth=0.102 midlayer2_maxwidth=1816.048 midlayer2_prefwidth=0.102 midlayer3_minwidth=0.102 midlayer3_maxwidth=1816.048 midlayer3_prefwidth=0.102 midlayer4_minwidth=0.102 midlayer4_maxwidth=1816.048 midlayer4_prefwidth=0.102 bottomlayer_minwidth=0.102 bottomlayer_maxwidth=1816.048 bottomlayer_prefwidth=0.102 maxuncoupledlength=12.7
Height [All] p1: minheight=0 maxheight=1816.048 prefheight=12.7
HoleSize [All] p1: absolutevalues=TRUE maxlimit=6.3 minlimit=0.2 maxpercent=80.000 minpercent=20.000
HoleToHoleClearance [All] p1: gap=0.25 allowstackedmicrovias=FALSE
MinimumAnnularRing [All] p1: minimumring=0.076
MinimumSolderMaskSliver [All] p1: minsoldermaskwidth=0
PlaneClearance [All] p1: clearance=0.102
PlaneConnect PlaneConnectPowerPads [InPadClass('PowerPads')] p1: planeconnectstyle=Direct reliefexpansion=0.508 reliefentries=4 reliefconductorwidth=0.254 reliefairgap=0.254
PlaneConnect [All] p2: pad.planeconnectstyle=Relief pad.reliefexpansion=0.3 pad.reliefentries=4 pad.reliefconductorwidth=0.102 pad.reliefairgap=0.102 via.planeconnectstyle=Direct via.reliefexpansion=0.3 via.reliefentries=4 via.reliefconductorwidth=0.127 via.reliefairgap=0.127
PolygonConnect PolygonConnectPowerPads [InNetClass('PowerNets')] p1: thpad.connectstyle=Direct thpad.reliefconductorwidth=0.254 thpad.reliefentries=4 thpad.polygonreliefangle="90 Angle" thpad.airgapwidth=0.254 smdpad.connectstyle=Relief smdpad.reliefconductorwidth=0.3 smdpad.reliefentries=4 smdpad.polygonreliefangle="90 Angle" smdpad.airgapwidth=0.12 smdpad.conductorbypadedge=TRUE smdpad.mindistance=0.381 smdpad.enablemindistance=FALSE via.connectstyle=Direct via.reliefconductorwidth=0.254 via.reliefentries=4 via.polygonreliefangle="90 Angle" via.airgapwidth=0.254
PolygonConnect [All] p2: thpad.connectstyle=Relief thpad.reliefconductorwidth=0.102 thpad.reliefentries=4 thpad.polygonreliefangle="90 Angle" thpad.airgapwidth=0.102 smdpad.connectstyle=Relief smdpad.reliefconductorwidth=0.102 smdpad.reliefentries=4 smdpad.polygonreliefangle="90 Angle" smdpad.airgapwidth=0.102 via.connectstyle=Direct via.reliefconductorwidth=0.127 via.reliefentries=4 via.polygonreliefangle="90 Angle" via.airgapwidth=0.127
RoutingVias [All] p1: holewidth=0.2 width=0.45 viastyle="Through Hole" minholewidth=0.2 minwidth=0.45 maxholewidth=6.3 maxwidth=6.55
SilkToSilkClearance [All] p1: silktosilkclearance=0
SilkToSolderMaskClearance [IsPad] p1: minsilkscreentomaskgap=0.102 clearancetoexposedcopper=TRUE
SolderMaskExpansion [All] p1: expansion=0.075 istentingtop=FALSE
SupplyNets "Schematic Supply Nets_27" [InNet('-15V_LDO')] p1: voltage=0.000
SupplyNets "Schematic Supply Nets_26" [InNet('15V_LDO')] p2: voltage=0.000
SupplyNets "Schematic Supply Nets_5" [InNet('LCD_BACK')] p3: voltage=0.000
SupplyNets "Schematic Supply Nets_10" [InNet('OUT_DUT_SNS-')] p4: voltage=0.000
SupplyNets "Schematic Supply Nets_7" [InNet('OUT_DUT_SNS')] p5: voltage=0.000
SupplyNets "Schematic Supply Nets" [InNet('3V3_ESP')] p6: voltage=0.000
SupplyNets "Schematic Supply Nets_25" [InNet('3V9')] p7: voltage=0.000
SupplyNets "Schematic Supply Nets_24" [InNet('5V_LDO2')] p8: voltage=0.000
SupplyNets "Schematic Supply Nets_23" [InNet('5V_LDO1')] p9: voltage=0.000
SupplyNets "Schematic Supply Nets_22" [InNet('-24V_LDO')] p10: voltage=0.000
SupplyNets "Schematic Supply Nets_21" [InNet('250mV')] p11: voltage=0.000
SupplyNets "Schematic Supply Nets_20" [InNet('325mV')] p12: voltage=0.000
SupplyNets "Schematic Supply Nets_19" [InNet('5V_LDO')] p13: voltage=0.000
SupplyNets "Schematic Supply Nets_18" [InNet('-26V_BOOST')] p14: voltage=0.000
SupplyNets "Schematic Supply Nets_17" [InNet('24V_LDO')] p15: voltage=0.000
SupplyNets "Schematic Supply Nets_16" [InNet('V_DUT')] p16: voltage=0.000
SupplyNets "Schematic Supply Nets_15" [InNet('OUT_DUT')] p17: voltage=0.000
SupplyNets "Schematic Supply Nets_14" [InNet('REF_OUT')] p18: voltage=0.000
SupplyNets "Schematic Supply Nets_13" [InNet('26V_BOOST')] p19: voltage=0.000
SupplyNets "Schematic Supply Nets_12" [InNet('5V3_BUCK')] p20: voltage=0.000
SupplyNets "Schematic Supply Nets_11" [InNet('3V3')] p21: voltage=0.000
SupplyNets "Schematic Supply Nets_9" [InNet('+15V_ANA')] p22: voltage=0.000
SupplyNets "Schematic Supply Nets_8" [InNet('GND')] p23: voltage=0.000
SupplyNets "Schematic Supply Nets_6" [InNet('5V_BUCK')] p24: voltage=0.000
SupplyNets "Schematic Supply Nets_4" [InNet('-15V_ANA')] p25: voltage=0.000
SupplyNets "Schematic Supply Nets_3" [InNet('VADJ2_BUCK')] p26: voltage=0.000
SupplyNets "Schematic Supply Nets_2" [InNet('VADJ1_BUCK')] p27: voltage=0.000
SupplyNets "Schematic Supply Nets_1" [InNet('20V_USB')] p28: voltage=0.000
Width [All] p1: maxlimit=1816.048 minlimit=0.102 preferedwidth=0.102
20 further rules are at their usual default settings.

## Classes and differential pairs
component class LCD: C79 C80 C81 IC1 J4 R42
differential pair class USB: USB_FS USB_HS
component class ESP32P4: BOOT C83 C84 C85 C86 C90 C91 DNP DOWN E1 L3 OK R2 R3 R4 R20 R41 R43 R44 R46 R51 R65 R67 R68 R69 R74 R75 R76 RST U30 UP
component class DAQ: C1 C2 C3 C4 C7 C9 C10 C11 C21 C22 C23 C24 C25 C26 C27 C28 C29 C30 C31 C32 C33 C34 C35 C36 C37 C38 C39 C40 C41 C42 C43 C51 C52 C53 C54 C55 C56 C57 C58 C59 C60 CR1 FB1 FB2 FB3 FB5 FB6 FB7 FB8 FB9 FB10 P1 R1 R5 R6 R24 R25 R26 R27 R28 R29 R30 R31 R32 R33 R34 R35 R36 R40 R47 R70 R71 R72 U1 U2 U8 U9 U10 U11 U12 U13 U14 U15 U16 U17 U18 U20 U21 U22 U23 U24 U25 Y1
net class PowerNets: 3V3 3V3_ESP 5V3_BUCK 5V_BUCK 15V_LDO 20V_USB 24V_LDO 26V_BOOST -15V_LDO -24V_LDO -26V_BOOST GND NetC66_2 NetC69_2 NetCR1_1 NetR24_1 NetR53_2 NetR55_1 OUT_DUT V_DUT
component class Power: C5 C6 C8 C12 C13 C14 C15 C16 C17 C18 C19 C20 C44 C45 C46 C47 C48 C49 C50 C61 C62 C63 C64 C65 C66 C67 C68 C69 C70 C71 C72 C73 C74 C75 C76 C77 C78 C92 C93 C94 C95 C96 C97 C98 D1 D2 D12 D13 FB4 FB11 FB12 L1 L2 R7 R8 R9 R10 R11 R12 R13 R14 R15 R16 R17 R18 R19 R21 R22 R23 R37 R38 R39 R52 R53 R55 R56 R57 R58 R59 R60 R62 R63 R66 R77 U3 U4 U5 U6 U7 U26 U27 U28 U29 U31
component class IOs: C82 C87 C88 C89 D3 D4 D5 D6 D7 D8 D9 D10 D11 J1 J2 J3 J5 R54 R61 R64 R73
differential pair USB_HS: +USB_HS_P -USB_HS_N
differential pair USB_FS: +USB_FS_P -USB_FS_N

## Components (designator, comment, footprint, x,y, rotation, side; value= is the part's Value field where it differs from the comment)
BOOT "430473035826" 430473035826 4.8,59.8 r180 top
C1 "1 µF" "CAP 0603_1608" 54.3,43.9 r270 top
C2 "1 µF" "CAP 0603_1608" 51.1,47.5 r270 top
C3 "1 µF" "CAP 0603_1608" 69.575,39.875 r180 top
C4 "0.1 µF" "CAP 0603_1608" 71.4,12.2 r0 top
C5 "1 µF" "CAP 0603_1608" 50.1,59.3 r90 top
C6 "1 µF" "CAP 0603_1608" 51.5,56.6 r270 top
C7 "0.33 µF" "CAP 1206_3216 - 0.8MM" 89.2,13.4 r180 top
C8 "22 µF" "CAP 0603_1608" 49.7,71.4 r90 top
C9 "0.1 µF" "CAP 0603_1608" 62.1,44.075 r270 top
C10 "0.1 µF" "CAP 0603_1608" 63.8,36.7 r90 top
C11 "0.1 µF" "CAP 0603_1608" 66.2,36.7 r90 top
C12 "22 µF" "CAP 0603_1608" 57.6,69.775 r270 top
C13 "0.047µF" "CAP 0603_1608" 66.8,76.4 r0 top
C14 "22 µF" "CAP 0603_1608" 59.2,69.775 r270 top
C15 "4.7 µF" "CAP 0805_2012" 70.9,71.1 r270 top
C16 "4.7 µF" "CAP 0805_2012" 69.1,71.1 r270 top
C17 "1 µF" "CAP 0603_1608" 60.8,69.875 r90 top
C18 "0.047µF" "CAP 0603_1608" 62,75.1 r270 top
C19 "4.7 µF" "CAP 0805_2012" 67.4,61.6 r180 top
C20 "4.7 µF" "CAP 0805_2012" 67.4,63.5 r180 top
C21 "0.1 µF" "CAP 0603_1608" 68.6,36.7 r90 top
C22 "0.1 µF" "CAP 0603_1608" 51.8,23 r180 top
C23 "0.1 µF" "CAP 0603_1608" 56.725,26.9 r180 top
C24 "0.1 µF" "CAP 0603_1608" 56.7,11.3 r0 top
C25 "0.1 µF" "CAP 0603_1608" 60.775,34.5 r0 top
C26 "0.1 µF" "CAP 0603_1608" 56.5,51 r90 top
C27 "0.1 µF" "CAP 0603_1608" 61.8,24.1 r270 top
C28 "0.1 µF" "CAP 0603_1608" 67,33.9 r0 top
C29 "0.1 µF" "CAP 0603_1608" 67,26.5 r180 top
C30 "0.1 µF" "CAP 0603_1608" 62.1,14.6 r90 top
C31 "0.1 µF" "CAP 0603_1608" 58.167,28.75 r0 top
C32 "0.1 µF" "CAP 0603_1608" 45.2,48.4 r0 top
C33 "0.1 µF" "CAP 0603_1608" 90.8,15.6 r180 top
C34 "2.2 µF" "CAP 0805_2012" 60.7,48.1 r0 top
C35 "1 µF" "CAP 0603_1608" 55,51 r90 top
C36 "0.1 µF" "CAP 0603_1608" 71.2,24.3 r270 top
C37 "0.1 µF" "CAP 0603_1608" 61.9,11.1 r0 top
C38 "0.1 µF" "CAP 0603_1608" 51.8,29.2 r0 top
C39 "0.1 µF" "CAP 0603_1608" 75.8,26.7 r180 top
C40 "0.1 µF" "CAP 0603_1608" 44.1,57.4 r0 top
C41 "1 µF" "CAP 0603_1608" 65,44.8 r180 top
C42 "0.1 µF" "CAP 0603_1608" 67,27.9 r180 top
C43 "0.1 µF" "CAP 0603_1608" 80.4,24.1 r270 top
C44 "0.1 µF" "CAP 0603_1608" 48.3,71.4 r90 top
C45 "2.2 µF" "CAP 0805_2012" 77.2,63.6 r0 top
C46 "2.2 µF" "CAP 0805_2012" 74.6,64.1 r90 top
C47 "1000 pF" "CAP 0603_1608" 76.7,67.7 r0 top
C48 "2.2 µF" "CAP 0805_2012" 74.7,61.3 r0 top
C49 "2.2 µF" "CAP 0805_2012" 74.7,57.7 r0 top
C50 "0.1 µF" "CAP 0603_1608" 77.3,54.85 r0 top
C51 "1 µF" "CAP 0603_1608" 80.2,43.6 r270 top
C52 "1 µF" "CAP 0603_1608" 93.5,32.9 r270 top
C53 "1 µF" "CAP 0603_1608" 76.3,47.6 r270 top
C54 "1 µF" "CAP 0603_1608" 89.2,36.1 r0 top
C55 "1 µF" "CAP 0603_1608" 44.9,41.2 r0 top
C56 "1 µF" "CAP 0603_1608" 70.9,41.6 r0 top
C57 "1 µF" "CAP 0603_1608" 84.1,30.2 r0 top
C58 "1 µF" "CAP 0603_1608" 55,38.9 r180 top
C59 "1 µF" "CAP 0603_1608" 80.8,39.4 r180 top
C60 "1 µF" "CAP 0603_1608" 94.2,28.8 r180 top
C61 "0.1 µF" "CAP 0603_1608" 51.5,59.3 r90 top
C62 "0.1 µF" "CAP 0603_1608" 50.1,56.6 r270 top
C63 "0.1 µF" "CAP 0603_1608" 30.2,21.6 r270 top
C64 "0.1 µF" "CAP 0603_1608" 42.9,65.8 r0 top
C65 "22µF" "CAP 2220_5650 3.0MM" 14.6,7.7 r90 top
C66 "22µF" "CAP 2220_5650 3.0MM" 20.4,9.8 r90 top
C67 "22µF" "CAP 2220_5650 3.0MM" 14.5,17.5 r270 top
C68 "10 µF" "CAP 1210_3225 - 1MM" 19.3,18.6 r270 top
C69 "22µF" "CAP 2220_5650 3.0MM" 41.8,13.3 r270 top
C70 "22µF" "CAP 2220_5650 3.0MM" 50.25,6 r90 top
C71 "47 pF" "CAP 0603_1608" 47.1,12 r270 top
C72 "0.1 µF" "CAP 0603_1608" 42.1,74.1 r180 top
C73 "4.7 µF" "CAP 0805_2012" 42.9,64.2 r0 top
C74 "0.1 µF" "CAP 0603_1608" 39.8,22.3 r270 top
C75 "0.1 µF" "CAP 0603_1608" 40.4,17.7 r180 top
C76 "22 µF" "CAP 0603_1608" 42.1,75.6 r180 top
C77 "10000 pF" "CAP 0603_1608" 38.3,65.9 r90 top
C78 "10000 pF" "CAP 0603_1608" 39.8,65.9 r90 top
C79 "0.1 µF" "CAP 0603_1608" 76.75,51.5 r270 top
C80 "1 µF" "CAP 0603_1608" 75.5,51.5 r270 top
C81 "0.1 µF" "CAP 0603_1608" 79,48 r180 top
C82 "0.1 µF" "CAP 0603_1608" 107.125,67.125 r90 top
C83 "1 µF" "CAP 0603_1608" 35.3,46 r90 top
C84 "22 µF" "CAP 0603_1608" 33.9,46 r90 top
C85 "4.7 pF" "CAP 0603_1608" 17.65,76.6 r0 top
C86 "2.7 pF" "CAP 0603_1608" 14.37,76.75 r0 top
C87 "0.1 µF" "CAP 0603_1608" 106.9,15.85 r90 top
C88 "0.1 µF" "CAP 0603_1608" 107.075,32.95 r90 top
C89 "0.1 µF" "CAP 0603_1608" 107.325,50.1 r90 top
C90 "0.1 µF" "CAP 0603_1608" 32.5,46 r90 top
C91 "1 µF" "CAP 0603_1608" 32.5,52 r270 top
C92 "2.2 µF" "CAP 0805_2012" 89.3,68.85 r0 top
C93 "2.2 µF" "CAP 0805_2012" 86.175,68.85 r180 top
C94 "1000 pF" "CAP 0603_1608" 83.8,70.4 r180 top
C95 "2.2 µF" "CAP 0805_2012" 85.2,66.275 r0 top
C96 "2.2 µF" "CAP 0805_2012" 90.8,63.625 r180 top
C97 "0.1 µF" "CAP 0603_1608" 90.855,67.4 r180 top
C98 "1 µF" "CAP 0603_1608" 61.625,73 r0 top
CR1 "RS1MWF-7" SOD123F_RS1MWF_DIO 62.1,26.9 r180 top
D1 "DFLS240-7" FP-PowerDI123-MFG 71.6,66.95 r90 top value=28pF
D2 "DFLS240-7" FP-PowerDI123-MFG 63.4,63.6 r180 top value=28pF
D3 "NRVBA340T3G" FP-403D-MFG 11.1,23.6 r180 top
D4 "XL-2020RGBC-WS2812B" LED_XL-2020RGBC-WS2812B 106.05,10.225 r270 top
D5 "XL-2020RGBC-WS2812B" LED_XL-2020RGBC-WS2812B 106.05,18.764 r270 top
D6 "XL-2020RGBC-WS2812B" LED_XL-2020RGBC-WS2812B 106.15,27.304 r270 top
D7 "XL-2020RGBC-WS2812B" LED_XL-2020RGBC-WS2812B 106.15,35.843 r270 top
D8 "XL-2020RGBC-WS2812B" LED_XL-2020RGBC-WS2812B 106.2,44.382 r270 top
D9 "XL-2020RGBC-WS2812B" LED_XL-2020RGBC-WS2812B 106.1,52.921 r270 top
D10 "XL-2020RGBC-WS2812B" LED_XL-2020RGBC-WS2812B 106.1,61.461 r270 top
D11 "XL-2020RGBC-WS2812B" LED_XL-2020RGBC-WS2812B 106,70 r270 top
D12 "BZT52C27-7-F" SOD-123 74.225,70.825 r270 top
D13 "BZT52C27-7-F" SOD-123 71.25,61.7 r90 top
DNP "100 kOhms" "RES 0603_1608" 23,25 r180 top
DOWN "430473035826" 430473035826 35,20 r270 bottom
E1 "PRO-OB-440" XDCR_PRO-OB-440 17.975,76.6 r90 top
FB1 "1000 Ohms @ 100 MHz" "FER 0603_1608" 44.9,43.2 r0 top
FB2 "1000 Ohms @ 100 MHz" "FER 0603_1608" 54.875,40.6 r180 top
FB3 "1000 Ohms @ 100 MHz" "FER 0603_1608" 49.6,47.5 r270 top
FB4 "600 Ohms @ 100MHz" "FER 0805_2012" 58.4,67.275 r0 top
FB5 "1000 Ohms @ 100 MHz" "FER 0603_1608" 70.9,43.1 r0 top
FB6 "1000 Ohms @ 100 MHz" "FER 0603_1608" 84.3,33.3 r0 top
FB7 "1000 Ohms @ 100 MHz" "FER 0603_1608" 80.8,40.7 r180 top
FB8 "1000 Ohms @ 100 MHz" "FER 0603_1608" 94.2,30.3 r180 top
FB9 "1000 Ohms @ 100 MHz" "FER 0603_1608" 74.7,47.4 r270 top
FB10 "1000 Ohms @ 100 MHz" "FER 0603_1608" 84.3,34.9 r0 top
FB11 "470 Ohms @ 100 MHz" "FER 1206_3216" 14.6,12.8 r0 top
FB12 "470 Ohms @ 100 MHz" "FER 1206_3216" 44.25,8.5 r0 top
IC1 "Taken From Chinese PCB" "DIODES SOT-23-3" 79.25,50.45 r180 top
J1 "USB4085-GF-A" FP-USB4085-GF-A-MFG 2.25,20.5 r270 top
J2 "PR20204VBDN" FP-PR20204VBDN-MFG 6.02,11.02 r180 top
J3 "PR20204VBDN" FP-PR20204VBDN-MFG 92.02,39.98 r180 top
J4 "52745-0897" MOLX-52745-0897 71,54 r0 top locked
J5 "PR20204VBDN" FP-PR20204VBDN-MFG 6.02,67.98 r180 top
L1 "10µH" "IND 1008_2520" 64.8,66.1 r0 top
L2 "4.7µH" "IND 1008_2520" 69.1,66.8 r270 top
L3 "1.6 nH" "Murata LQW18 0603" 19.975,77.1 r270 top
OK "430473035826" 430473035826 76,28 r270 bottom
P1 "691382010004" 691382010004 89.2,5.2 r0 top
R1 "0 Ohms" "RES 0603_1608" 45.5,37.1 r270 top
R2 "100 kOhms" "RES 0603_1608" 12,55.5 r180 top
R3 "100 kOhms" "RES 0603_1608" 9.1,55.5 r0 top
R4 "100 kOhms" "RES 0603_1608" 23,23.6 r180 top
R5 "1.69 kOhms" "RES 0603_1608" 54.975,8 r0 top
R6 "1.69 kOhms" "RES 0603_1608" 70.3,7.175 r180 top
R7 "34.8 kOhms" "RES 0603_1608" 52.2,54.5 r180 top
R8 "6.98 kOhms" "RES 0603_1608" 54.5,54.5 r180 top
R9 "22 kOhms" "RES 0603_1608" 39,68.2 r0 top
R10 "44.2 kOhms" "RES 0603_1608" 39,70.8 r0 top
R11 "78.7 kOhms" "RES 0603_1608" 39,69.5 r0 top
R12 "3.16 MOhms" "RES 0603_1608" 70.95,73.7 r180 top
R13 "10 kOhms" "RES 0603_1608" 67.3,74.3 r270 top
R14 "51.1 kOhms" "RES 0603_1608" 64.8,75.1 r270 top
R15 "102 kOhms" "RES 0603_1608" 61.7,61.7 r0 top
R16 "27 kOhms" "RES 0603_1608" 63.5,75.1 r270 top
R17 "150 kOhms" "RES 0603_1608" 80.1,63.6 r180 top
R18 "18.7 kOhms" "RES 0603_1608" 34.6,26.8 r270 top
R19 "18.7 kOhms" "RES 0603_1608" 35.9,26.8 r270 top
R20 "100 kOhms" "RES 0603_1608" 33.55,33.6 r0 top
R21 "13 kOhms" "RES 0603_1608" 80.8,65.55 r270 top
R22 "100 kOhms" "RES 0603_1608" 68.8,74.3 r270 top
R23 "3.4 MOhms" "RES 0603_1608" 64.3,61.7 r180 top
R24 "51 Ohms" "STACKPOLE CSR2512" 57.3,20.2 r180 top
R25 "10 kOhms" "RES 0603_1608" 52.5,14.5 r90 top
R26 "1 kOhms" "RES 0603_1608" 56.8,7.4 r270 top
R27 "2 Ohms" "STACKPOLE CSR2512" 66.8,20.2 r0 top
R28 "10 kOhms" "RES 0603_1608" 66.8,10.8 r90 top
R29 "1 kOhms" "RES 0603_1608" 67.625,7.2 r180 top
R30 "50 mOhms" "TE TLRP 2512" 75.8,20.2 r180 top
R31 "19.1 kOhms" "RES 0603_1608" 62.6,39.2 r90 top
R32 "2.8 kOhms" "RES 0603_1608" 65,39.2 r90 top
R33 "14.3 kOhms" "RES 0603_1608" 67.4,39.2 r90 top
R34 "1 kOhms" "RES 0603_1608" 62.6,36.7 r90 top
R35 "10 kOhms" "RES 0603_1608" 65,36.7 r90 top
R36 "1 kOhms" "RES 0603_1608" 67.4,36.7 r90 top
R37 "13 kOhms" "RES 0603_1608" 79.78,56.023 r180 top
R38 "13 kOhms" "RES 0603_1608" 79.8,54.825 r180 top
R39 "147 kOhms" "RES 0603_1608" 77.3,56 r0 top
R40 "0 Ohms" "RES 0603_1608" 71.6,36.9 r270 top
R41 "100 kOhms" "RES 0603_1608" 34,43.5 r0 top
R42 "1 kOhms" "RES 0603_1608" 82,50.25 r90 top
R43 "10 kOhms" "RES 0603_1608" 33.55,37.5 r0 top
R44 "10 kOhms" "RES 0603_1608" 33.55,35.5 r0 top
R46 "10 kOhms" "RES 0603_1608" 16.55,25 r0 top
R47 "0 Ohms" "RES 0603_1608" 93.7,26.7 r270 top
R51 "100 kOhms" "RES 0603_1608" 33.55,32.3 r0 top
R52 "191 kOhms" "RES 0603_1608" 90.05,70.9 r90 top
R53 "20 mOhms" "STACKPOLE CSR1206" 20.8,14.9 r0 top
R54 "0 Ohms" "RES 0603_1608" 8,72 r180 top
R55 "22 mOhms" "STACKPOLE CSR1206" 40,6.9 r90 top
R56 "90.9 kOhms" "RES 0603_1608" 45.7,12 r270 top
R57 "11.3 kOhms" "RES 0603_1608" 47.1,14.5 r270 top
R58 "17.8 kOhms" "RES 0603_1608" 34,21.5 r180 top
R59 "10.2 kOhms" "RES 0603_1608" 34,20 r0 top
R60 "105 kOhms" "RES 0603_1608" 45.7,14.45 r270 top
R61 "5.1 kOhms" "RES 0603_1608" 2.3,26.5 r180 top
R62 "10 kOhms" "RES 0603_1608" 88.125,72.225 r0 top
R63 "13 kOhms" "RES 0603_1608" 88.445,66.275 r0 top
R64 "5.1 kOhms" "RES 0603_1608" 2.7,14.6 r180 top
R65 "100 kOhms" "RES 0603_1608" 16.9,54.9 r180 top
R66 "13 kOhms" "RES 0603_1608" 88.5,67.4 r180 top
R67 "100 kOhms" "RES 0603_1608" 13.35,68.2 r180 top
R68 "10 kOhms" "RES 0603_1608" 33.55,29.5 r0 top
R69 "10 kOhms" "RES 0603_1608" 33.55,30.9 r0 top
R70 "0 Ohms" "RES 0603_1608" 96.3,8.5 r270 top
R71 "100 Ohms" "RES 0603_1608" 91.75,11.5 r0 top
R72 "100 Ohms" "RES 0603_1608" 86.7,11.2 r180 top
R73 "1 kOhms" "RES 0603_1608" 102.85,8 r180 top
R74 "10 kOhms" "RES 0603_1608" 32.5,49.1 r270 top
R75 "100 Ohms" "RES 0603_1608" 20.2,57.7 r180 top
R76 "10 kOhms" "RES 0603_1608" 9,64 r0 top
R77 "243 kOhms" "RES 0603_1608" 90.867,66.275 r180 top
RST "430473035826" 430473035826 14.25,59.8 r180 top
U1 "ADAQ7769-1BBCZ" BC-84-4_ADI 50,39.6 r90 top
U2 "AD7415ARTZ-0500RL7" ADI-RJ-5_M 71.4,9.8 r180 top
U3 "TPS74601PDRVT" SON65P200X200X80-7N 53.5,58 r90 top
U4 "LTM8078EY#PBF" FP-BGA-49-05-08-1518-IPC_C 44.1,69.9 r180 top
U5 "ADP5071ACPZ" FP-CP-20-8-IPC_A 64.8,70.4 r180 top
U6 "ADP7142ACPZN-R7" FP-CP-6-3-IPC_B 77.8,65.7 r180 top
U7 "ADP7182ACPZN-R7" FP-CP-6-3-IPC_B 77.9,59 r90 top
U8 "ADCMP600BKSZ-R2" ADI-KS-5_L 51.8,25 r180 top
U9 "ADG6412BCPZ-REEL7" CP_16_17_ADI 57.1,15.2 r270 top
U10 "AD8411AWBRMZ" RM-8_ADI 57.3,24.1 r180 top
U11 "ADCMP600BKSZ-R2" ADI-KS-5_L 67,31.9 r0 top
U12 "SN74HCS02QPWRQ1" FP-PW0014A-IPC_B 61.9,7.5 r0 top
U13 "ADG6412BCPZ-REEL7" CP_16_17_ADI 66.8,15.3 r180 top
U14 "AD8411AWBRMZ" RM-8_ADI 66.8,23.9 r180 top
U15 "ADCMP600BKSZ-R2" ADI-KS-5_L 51.8,27.3 r0 top
U16 "AD8411AWBRMZ" RM-8_ADI 75.8,23.8 r180 top
U17 "ADCMP600BKSZ-R2" ADI-KS-5_L 67,29.8 r180 top
U18 "ADR4540CRZ" FP-R-8-IPC_C 60.8,51.7 r0 top
U20 "CDCLVC1104PWR" FP-PW0008A-MFG 45.1,51.1 r0 top
U21 "LT6656BCS6-5#TRMPBF" FP-S6-6-05-08-1636-IPC_B 65.066,42.3 r180 top
U22 "ADAQ7769-1BBCZ" BC-84-4_ADI 75.9,39.6 r90 top
U23 "ADAQ7769-1BBCZ" BC-84-4_ADI 89.2,28.9 r90 top
U24 "ADG5204BCPZ-RL7" CP_16_17_ADI 62.1,31.2 r90 top
U25 "ADG5204BCPZ-RL7" CP_16_17_ADI 89.3,19 r270 top
U26 "DS4424+" 21-0137_T1433+2_MXM 37.3,23.1 r270 top
U27 "LTM8056MPY#PBF" FP-BGA-121-05-08-1891-IPC_C 31.04,11.17 r180 top
U28 "AD7415ARTZ-0500RL7" ADI-RJ-5_M 27.1,21.6 r180 top
U29 "ADP7142ACPZN-R7" FP-CP-6-3-IPC_B 87.025,70.55 r180 top
U30 "ESP32-P4_MODULE" XCVR_ESP32-P4_MODULE 17.5,40 r270 top locked
U31 "ADP7182ACPZN-R7" FP-CP-6-3-IPC_B 86.925,64.325 r180 top
UP "430473035826" 430473035826 35,35 r270 bottom
Y1 "SiT8208AI-22-33E-16.384000X" FP-SiT8208-2-MFG 44.9,54.9 r180 top

## Footprints (in the part's own frame and the unit in brackets; to place one, negate y for a bottom-side part, rotate by r counter-clockwise, add the part's x,y. Pads: shape width x height; smd on the part's side, far side on the other; paste and mask are expansions set on the pad)
21-0137_T1433+2_MXM [mil]
  rect 28x8 smd paste+0 mask+0: 1(-59,47.24) 2(-59,31.5) 3(-59,15.75) 4(-59,0) 5(-59,-15.75) 6(-59,-31.5) 7(-59,-47.24) 8(59,-47.24) 9(59,-31.5) 10(59,-15.75) 11(59,0) 12(59,15.75) 13(59,31.5) 14(59,47.24)
  rect 67x94 smd paste+0 mask+0: 15(0,0)
  silkscreen extent -95,-66 66,66, body extent -61,-61 61,61, height 32
430473035826 [mm] "SMD Tact Switch, body 6x6mm"
  rect 1.7x1.4 smd: A1(-3.35,2) A2(3.35,2) B1(-3.35,-2) B2(3.35,-2)
  silkscreen extent -3.2,-3.2 3.2,3.2, body extent -3.6,-3.1 3.6,3.1, height 3.5
691382010004 [mm] "Horizontal PCB Header, pitch 2.5mm, 04p"
  rrect50% 2x2 hole 1.4: 1(-3.75,3.95)
  round 2 hole 1.4: 2(-1.25,3.95) 3(1.25,3.95) 4(3.75,3.95)
  silkscreen extent -6,-5.05 6,5.05, body extent -6,-5.05 6,5.05, height 8.15
ADI-KS-5_L [mm] "SOT23, 5-Leads, Body 2x1.25mm, Pitch 0.65mm, IPC High Density"
  rect 0.7x0.35 smd: 1(-0.95,0.65) 2(-0.95,0) 3(-0.95,-0.65) 4(0.95,-0.65) 5(0.95,0.65)
  silkscreen extent -1.08,1.25 -0.83,1.5, body extent -1.05,-1 1.05,1, height 1.1
ADI-RJ-5_M [mm] "SOT-23, 5-Leads, Body 2.9x1.6mm, Pitch 0.95mm, IPC Low Density"
  rect 1.3x0.7 smd: 1(-1.2,0.95) 2(-1.2,0) 3(-1.2,-0.95) 4(1.2,-0.95) 5(1.2,0.95)
  silkscreen extent -1.33,-1.5 0.15,1.97, body extent -1.25,-1.5 1.25,1.5, height 1.1
BC-84-4_ADI [mm]
  round 0.406 smd paste+0 mask+0: A1(-5.2,2) A2(-4.4,2) A3(-3.6,2) A4(-2.8,2) A5(-2,2) A6(-1.2,2) A7(-0.4,2) A8(0.4,2) A9(1.2,2) A10(2,2) A11(2.8,2) A12(3.6,2) A13(4.4,2) A14(5.2,2) B1(-5.2,1.2) B2(-4.4,1.2) B3(-3.6,1.2) B4(-2.8,1.2) B5(-2,1.2) B6(-1.2,1.2) B7(-0.4,1.2) B8(0.4,1.2) B9(1.2,1.2) B10(2,1.2) B11(2.8,1.2) B12(3.6,1.2) B13(4.4,1.2) B14(5.2,1.2) C1(-5.2,0.4) C2(-4.4,0.4) C3(-3.6,0.4) C4(-2.8,0.4) C5(-2,0.4) C6(-1.2,0.4) C7(-0.4,0.4) C8(0.4,0.4) C9(1.2,0.4) C10(2,0.4) C11(2.8,0.4) C12(3.6,0.4) C13(4.4,0.4) C14(5.2,0.4) D1(-5.2,-0.4) D2(-4.4,-0.4) D3(-3.6,-0.4) D4(-2.8,-0.4) D5(-2,-0.4) D6(-1.2,-0.4) D7(-0.4,-0.4) D8(0.4,-0.4) D9(1.2,-0.4) D10(2,-0.4) D11(2.8,-0.4) D12(3.6,-0.4) D13(4.4,-0.4) D14(5.2,-0.4) E1(-5.2,-1.2) E2(-4.4,-1.2) E3(-3.6,-1.2) E4(-2.8,-1.2) E5(-2,-1.2) E6(-1.2,-1.2) E7(-0.4,-1.2) E8(0.4,-1.2) E9(1.2,-1.2) E10(2,-1.2) E11(2.8,-1.2) E12(3.6,-1.2) E13(4.4,-1.2) E14(5.2,-1.2) F1(-5.2,-2) F2(-4.4,-2) F3(-3.6,-2) F4(-2.8,-2) F5(-2,-2) F6(-1.2,-2) F7(-0.4,-2) F8(0.4,-2) F9(1.2,-2) F10(2,-2) F11(2.8,-2) F12(3.6,-2) F13(4.4,-2) F14(5.2,-2)
  silkscreen extent -6.35,-3.43 6.35,4.12, body extent -6.04,-3.05 6.04,3.05, height 1.6
"CAP 0603_1608" [mm] "Chip Capacitor, 2-Leads, Body 1.60x0.80mm, IPC Medium Density"
  rect 0.9x1 smd: 1(-0.675,0) 2(0.675,0)
  silkscreen extent -1.4,-0.7 1.4,0.7, body extent -0.8,-0.41 0.8,0.41, height 0.82
"CAP 0805_2012" [mm] "Chip Capacitor, 2-Leads, Body 2.00x1.20mm, IPC Medium Density"
  rect 1.3x1.4 smd: 1(-0.8,0) 2(0.8,0)
  silkscreen extent -1.7,-0.9 1.7,0.9, body extent -1,-0.64 1,0.64, height 1.26
"CAP 1206_3216 - 0.8MM" [mm] "Chip Capacitor, 2-Leads, Body 3.25x1.60mm, IPC Medium Density"
  rect 1.3x1.8 smd: 1(-1.45,0) 2(1.45,0)
  silkscreen extent -2.37,-1.12 2.37,1.12, body extent -1.6,-0.8 1.6,0.8, height 0.8
"CAP 1210_3225 - 1MM" [mm] "Chip Capacitor, 2-Leads, Body 3.20x2.50mm, IPC Medium Density"
  rect 1.3x2.7 smd: 1(-1.4,0) 2(1.4,0)
  silkscreen extent -2.37,-1.63 2.37,1.63, body extent -1.6,-1.25 1.6,1.25, height 1
"CAP 2220_5650 3.0MM" [mm] "Chip Capacitor, 2-Leads, Body 5.70x5.00mm, IPC Medium Density"
  rect 1.7x5.4 smd: 1(-2.55,0) 2(2.55,0)
  silkscreen extent -3.6,-2.9 3.6,2.9, body extent -2.85,-2.5 2.85,2.5, height 3
CP_16_17_ADI [mm]
  rect 0.905x0.299 smd paste+0 mask+0: 1(-1.902,0.975) 2(-1.902,0.325) 3(-1.902,-0.325) 4(-1.902,-0.975) 9(1.902,-0.975) 10(1.902,-0.325) 11(1.902,0.325) 12(1.902,0.975)
  rect 0.299x0.905 smd paste+0 mask+0: 5(-0.975,-1.902) 6(-0.325,-1.902) 7(0.325,-1.902) 8(0.975,-1.902) 13(0.975,1.902) 14(0.325,1.902) 15(-0.325,1.902) 16(-0.975,1.902)
  rect 2.6x2.6 smd paste-1.3 mask+0: 17(0,0)
  silkscreen extent -2.79,-2.13 2.13,2.13, body extent -2.05,-2.05 2.05,2.05, height 0.8
"DIODES SOT-23-3" [mm] "SOT23, 3-Leads, Body 2.90x2.40mm, Pitch 0.95mm, IPC Medium Density"
  rect 0.9x0.8 smd: 1(-1,0.95) 2(-1,-0.95) 3(1,0)
  silkscreen extent -0.7,-1.45 0.7,1.45, body extent -1.41,-1.45 1.41,1.45, height 1.5
"FER 0603_1608" [mm] "Chip Ferrite, 2-Leads, Body 1.60x0.80mm, IPC Medium Density"
  rect 0.9x1 smd: 1(-0.675,0) 2(0.675,0)
  silkscreen extent -1.4,-0.7 1.4,0.7, body extent -0.8,-0.41 0.8,0.41, height 0.82
"FER 0805_2012" [mm] "Chip Ferrite, 2-Leads, Body 2.00x1.20mm, IPC Medium Density"
  rect 1.3x1.4 smd: 1(-0.8,0) 2(0.8,0)
  silkscreen extent -1.7,-0.9 1.7,0.9, body extent -1,-0.64 1,0.64, height 1.26
"FER 1206_3216" [mm] "Chip Ferrite, 2-Leads, Body 3.20x1.60mm, IPC Medium Density"
  rect 1.4x2 smd: 1(-1.8,0) 2(1.8,0)
  silkscreen extent -2.7,-1.2 2.7,1.2, body extent -1.65,-0.85 1.65,0.85, height 1.3
FP-403D-MFG [mm]
  rect 2x2 smd paste+0 mask+0: 1(-2,0) 2(2,0)
  silkscreen extent -4.3,-1.46 2.28,1.46, body extent -3.1,-1.56 3.1,1.56, height 0.25
FP-BGA-49-05-08-1518-IPC_C [mm]
  round 0.4 smd paste+0 mask+0: A1(-2.4,2.4) A2(-1.6,2.4) A3(-0.8,2.4) A4(0,2.4) A5(0.8,2.4) A6(1.6,2.4) A7(2.4,2.4) B1(-2.4,1.6) B2(-1.6,1.6) B3(-0.8,1.6) B4(0,1.6) B5(0.8,1.6) B6(1.6,1.6) B7(2.4,1.6) C1(-2.4,0.8) C2(-1.6,0.8) C3(-0.8,0.8) C4(0,0.8) C5(0.8,0.8) C6(1.6,0.8) C7(2.4,0.8) D1(-2.4,0) D2(-1.6,0) D3(-0.8,0) D4(0,0) D5(0.8,0) D6(1.6,0) D7(2.4,0) E1(-2.4,-0.8) E2(-1.6,-0.8) E3(-0.8,-0.8) E4(0,-0.8) E5(0.8,-0.8) E6(1.6,-0.8) E7(2.4,-0.8) F1(-2.4,-1.6) F2(-1.6,-1.6) F3(-0.8,-1.6) F4(0,-1.6) F5(0.8,-1.6) F6(1.6,-1.6) F7(2.4,-1.6) G1(-2.4,-2.4) G2(-1.6,-2.4) G3(-0.8,-2.4) G4(0,-2.4) G5(0.8,-2.4) G6(1.6,-2.4) G7(2.4,-2.4)
  silkscreen extent -3.63,-3.13 3.13,3.13, body extent -3.22,-3.22 3.22,3.22, height 0.25
FP-BGA-121-05-08-1891-IPC_C [mm]
  round 0.6 smd paste+0 mask+0: A1(-6.35,6.35) A2(-5.08,6.35) A3(-3.81,6.35) A4(-2.54,6.35) A5(-1.27,6.35) A6(0,6.35) A7(1.27,6.35) A8(2.54,6.35) A9(3.81,6.35) A10(5.08,6.35) A11(6.35,6.35) B1(-6.35,5.08) B2(-5.08,5.08) B3(-3.81,5.08) B4(-2.54,5.08) B5(-1.27,5.08) B6(0,5.08) B7(1.27,5.08) B8(2.54,5.08) B9(3.81,5.08) B10(5.08,5.08) B11(6.35,5.08) C1(-6.35,3.81) C2(-5.08,3.81) C3(-3.81,3.81) C4(-2.54,3.81) C5(-1.27,3.81) C6(0,3.81) C7(1.27,3.81) C8(2.54,3.81) C9(3.81,3.81) C10(5.08,3.81) C11(6.35,3.81) D1(-6.35,2.54) D2(-5.08,2.54) D3(-3.81,2.54) D4(-2.54,2.54) D5(-1.27,2.54) D6(0,2.54) D7(1.27,2.54) D8(2.54,2.54) D9(3.81,2.54) D10(5.08,2.54) D11(6.35,2.54) E1(-6.35,1.27) E2(-5.08,1.27) E3(-3.81,1.27) E4(-2.54,1.27) E5(-1.27,1.27) E6(0,1.27) E7(1.27,1.27) E8(2.54,1.27) E9(3.81,1.27) E10(5.08,1.27) E11(6.35,1.27) F1(-6.35,0) F2(-5.08,0) F3(-3.81,0) F4(-2.54,0) F5(-1.27,0) F6(0,0) F7(1.27,0) F8(2.54,0) F9(3.81,0) F10(5.08,0) F11(6.35,0) G1(-6.35,-1.27) G2(-5.08,-1.27) G3(-3.81,-1.27) G4(-2.54,-1.27) G5(-1.27,-1.27) G6(0,-1.27) G7(1.27,-1.27) G8(2.54,-1.27) G9(3.81,-1.27) G10(5.08,-1.27) G11(6.35,-1.27) H1(-6.35,-2.54) H2(-5.08,-2.54) H3(-3.81,-2.54) H4(-2.54,-2.54) H5(-1.27,-2.54) H6(0,-2.54) H7(1.27,-2.54) H8(2.54,-2.54) H9(3.81,-2.54) H10(5.08,-2.54) H11(6.35,-2.54) J1(-6.35,-3.81) J2(-5.08,-3.81) J3(-3.81,-3.81) J4(-2.54,-3.81) J5(-1.27,-3.81) J6(0,-3.81) J7(1.27,-3.81) J8(2.54,-3.81) J9(3.81,-3.81) J10(5.08,-3.81) J11(6.35,-3.81) K1(-6.35,-5.08) K2(-5.08,-5.08) K3(-3.81,-5.08) K4(-2.54,-5.08) K5(-1.27,-5.08) K6(0,-5.08) K7(1.27,-5.08) K8(2.54,-5.08) K9(3.81,-5.08) K10(5.08,-5.08) K11(6.35,-5.08) L1(-6.35,-6.35) L2(-5.08,-6.35) L3(-3.81,-6.35) L4(-2.54,-6.35) L5(-1.27,-6.35) L6(0,-6.35) L7(1.27,-6.35) L8(2.54,-6.35) L9(3.81,-6.35) L10(5.08,-6.35) L11(6.35,-6.35)
  silkscreen extent -8.13,-7.5 7.5,7.5, body extent -7.6,-7.6 7.6,7.6, height 0.25
FP-CP-6-3-IPC_B [mm]
  rect 0.656x0.292 smd paste+0 mask+0: 1(-1.028,0.65)
  rrect100% 0.656x0.292 smd paste+0 mask+0: 2(-1.028,0) 3(-1.028,-0.65) 4(1.028,-0.65) 5(1.028,0) 6(1.028,0.65)
  rect 1.1x1.7 smd paste-1000 mask+0: 7(0,0)
  silkscreen extent -2.03,-1 1,1, body extent -1.61,-1.25 1.61,1.25, height 0.25
FP-CP-20-8-IPC_A [mm]
  rect 0.931x0.239 smd paste+0 mask+0: 1(-1.991,1)
  rrect100% 0.931x0.239 smd paste+0 mask+0: 2(-1.991,0.5) 3(-1.991,0) 4(-1.991,-0.5) 5(-1.991,-1) 11(1.991,-1) 12(1.991,-0.5) 13(1.991,0) 14(1.991,0.5) 15(1.991,1)
  rrect100% 0.239x0.931 smd paste+0 mask+0: 6(-1,-1.991) 7(-0.5,-1.991) 8(0,-1.991) 9(0.5,-1.991) 10(1,-1.991) 16(1,1.991) 17(0.5,1.991) 18(0,1.991) 19(-0.5,1.991) 20(-1,1.991)
  rect 2.75x2.75 smd paste-1000 mask+0: 21(0,0)
  silkscreen extent -3.38,-2 2,2, body extent -2.96,-2.96 2.96,2.96, height 0.25
FP-PowerDI123-MFG [mm]
  rect 2.4x1.5 smd paste+0 mask+0: 1(0.85,0)
  rect 1.05x1.5 smd paste+0 mask+0: 2(-1.525,0)
  silkscreen extent -1.5,-1.17 2.75,1.17, body extent -2.15,-1.06 2.15,1.06, height 0.25
FP-PR20204VBDN-MFG [mm]
  rect 1.7x1.7 hole 1.1 paste-2539.97 mask+0: 1(-3.81,-1.27)
  round 1.7 hole 1.1 paste-2539.97 mask+0: 2(-3.81,1.27) 3(-1.27,-1.27) 4(-1.27,1.27) 5(1.27,-1.27) 6(1.27,1.27) 7(3.81,-1.27) 8(3.81,1.27)
  silkscreen extent -5.08,-3.09 5.08,2.5, body extent -5.18,-2.6 5.18,2.6, height 0.25
FP-PW0008A-MFG [mm]
  rrect22% 1.5x0.45 smd paste+0 mask+0: 1(-2.9,0.975) 2(-2.9,0.325) 3(-2.9,-0.325) 4(-2.9,-0.975) 5(2.9,-0.975) 6(2.9,-0.325) 7(2.9,0.325) 8(2.9,0.975)
  silkscreen extent -4.37,-1.55 1.77,1.55, body extent -3.75,-1.8 3.75,1.8, height 0.25
FP-PW0014A-IPC_B [mm]
  rect 1.655x0.381 smd paste+0 mask+0: 1(-2.825,1.95)
  rrect100% 1.655x0.381 smd paste+0 mask+0: 2(-2.825,1.3) 3(-2.825,0.65) 4(-2.825,0) 5(-2.825,-0.65) 6(-2.825,-1.3) 7(-2.825,-1.95) 8(2.825,-1.95) 9(2.825,-1.3) 10(2.825,-0.65) 11(2.825,0) 12(2.825,0.65) 13(2.825,1.3) 14(2.825,1.95)
  silkscreen extent -4.37,-2.5 1.5,2.5, body extent -3.9,-2.75 3.9,2.75, height 0.25
FP-R-8-IPC_C [mm]
  rect 1.874x0.542 smd paste+0 mask+0: 1(-2.316,1.905)
  rrect100% 1.874x0.542 smd paste+0 mask+0: 2(-2.316,0.635) 3(-2.316,-0.635) 4(-2.316,-1.905) 5(2.316,-1.905) 6(2.316,-0.635) 7(2.316,0.635) 8(2.316,1.905)
  silkscreen extent -4.23,-2.45 0.88,2.45, body extent -3.35,-2.55 3.35,2.55, height 0.25
FP-S6-6-05-08-1636-IPC_B [mm]
  rect 1.24x0.526 smd paste+0 mask+0: 1(-1.165,0.95)
  rrect100% 1.24x0.526 smd paste+0 mask+0: 2(-1.165,0) 3(-1.165,-0.95) 4(1.166,-0.95) 5(1.166,0) 6(1.166,0.95)
  silkscreen extent -2.41,-1.45 0.05,1.45, body extent -2.04,-1.7 2.04,1.7, height 0.25
FP-SiT8208-2-MFG [mm]
  rect 1.4x1.2 smd paste+0 mask+0: 1(-1.1,-0.95) 2(1.1,-0.95) 3(1.1,0.95) 4(-1.1,0.95)
  silkscreen extent -2.25,-2.27 2.25,1.25, body extent -1.9,-1.65 1.9,1.65, height 0.25
FP-USB4085-GF-A-MFG [mm]
  rrect100% 0.9x2.4 hole 2.1 slot 0.6 at 0 deg paste-2539.97 mask+0: 1(-4.325,3.045) 2(4.325,3.045)
  rrect100% 0.9x1.7 hole 1.4 slot 0.6 at 0 deg paste-2539.97 mask+0: 3(-4.325,-0.335) 4(4.325,-0.335)
  round 0.65 hole 0.4 paste-2539.97 mask+0: A1(-2.975,4.025) A4(-2.125,4.025) A5(-1.275,4.025) A6(-0.425,4.025) A7(0.425,4.025) A8(1.275,4.025) A9(2.125,4.025) A12(2.975,4.025) B1(2.975,2.675) B4(2.125,2.675) B5(1.275,2.675) B6(0.425,2.675) B7(-0.425,2.675) B8(-1.275,2.675) B9(-2.125,2.675) B12(-2.975,2.675)
  silkscreen extent -4.57,0.89 4.57,5.37, body extent -4.87,-4.83 4.87,4.83, height 0.25
"IND 1008_2520" [mm] "Chip Inductance, 2-leads, Body 2.5x2.1mm, IPC Medium Density"
  rect 1.2x1.75 smd: 1(-1.275,0) 2(1.275,0)
  silkscreen extent -2.18,-1.22 2.2,1.22, body extent -1.3,-1.05 1.3,1.05, height 1
LED_XL-2020RGBC-WS2812B [mm]
  rect 0.85x0.65 smd: 1(-0.675,0.65) 2(-0.675,-0.65) 3(0.675,-0.65) 4(0.675,0.65)
  silkscreen extent -1.85,0.55 -1.65,0.75, body extent -1.1,-1.02 1.1,0.98, height 0.84
MOLX-52745-0897 [mm] "FPC Connector, 8-Leads, Right Angle, Pitch 0.5 mm, Mated Height 2.0 mm, SMT"
  rect 0.8x0.3 smd: 1(-5.015,-2.766) 2(-5.015,-2.266) 3(-5.015,-1.766) 4(-5.015,-1.266) 5(-5.015,-0.766) 6(-5.015,-0.266) 7(-5.015,0.234) 8(-5.015,0.734)
  rect 1x1 smd: MP1(-3.367,-5.151) MP2(-3.367,3.119)
  Top Layer region: -4.615,-6.416 -4.615,-4.016 -1.565,-4.016 -1.565,-4.016 -1.565,-5.316 -2.414,-5.316 -2.415,-5.316 -2.415,-6.416
  Top Layer region: -4.615,1.984 -4.615,4.384 -2.415,4.384 -2.414,4.384 -2.414,3.284 -1.565,3.284 -1.565,1.984 -4.615,1.984
  Keep-Out Layer board cut-out: 15,7.5 15.038,7.691 15.146,7.854 15.309,7.962 15.5,8 15.5,8 16.5,8 16.691,7.962 16.854,7.854 16.962,7.691 17,7.5 17,7.5 17,-8.5 16.962,-8.691 16.854,-8.854 16.691,-8.962 16.5,-9 16.5,-9 15.5,-9 15.309,-8.962 15.146,-8.854 15.038,-8.691 15,-8.5 15,-8.5
  Keep-Out Layer region: -4.015,-4.016 -4.015,-3.216 -2.675,-3.216 -2.675,-4.016
  Keep-Out Layer region: -4.015,1.984 -4.015,1.184 -2.675,1.184 -2.675,1.984
  silkscreen extent -6.09,-6.07 1.29,4.03, body extent -48.54,-9.52 16,8.38, height 2.01
"Murata LQW18 0603" [mm] "Chip Inductor, 2-Leads, Body 1.65x0.99mm, IPC Medium Density"
  rect 0.625x0.85 smd: 1(-0.663,0) 2(0.663,0)
  silkscreen extent -1.2,-0.65 1.2,0.65, body extent -0.84,-0.58 0.83,0.58, height 1
"RES 0603_1608" [mm] "Chip Resistor, 2-Leads, Body 1.60x0.80mm, IPC Medium Density"
  rect 0.85x0.95 smd: 1(-0.65,0) 2(0.65,0)
  silkscreen extent -1.27,-0.7 1.27,0.7, body extent -0.8,-0.4 0.8,0.4, height 0.45
RM-8_ADI [mil]
  rect 60x18 smd paste+0 mask+0: 1(-85.5,38.39) 2(-85.5,12.8) 3(-85.5,-12.8) 4(-85.5,-38.39) 5(85.5,-38.39) 6(85.5,-12.8) 7(85.5,12.8) 8(85.5,38.39)
  silkscreen extent -147,-68 68,68, body extent -101,-63 101,63, height 43
SOD123F_RS1MWF_DIO [mil]
  rect 41x53 smd paste+0 mask+0: 1(-60.5,0) 2(60.5,0)
  silkscreen extent -105,-43 60,43, body extent -73,-37 73,37, height 35
SOD-123 [mm] "SOD, 2-Leads, Body 1.55x3.70mm, IPC Medium Density"
  rect 0.9x0.95 smd: 1(-1.575,0) 2(1.575,0)
  silkscreen extent -2.3,-0.92 2.41,0.92, body extent -1.86,-0.78 1.86,0.77, height 1.35
SON65P200X200X80-7N [mm]
  rect 0.66x0.32 smd: 1(-1.025,0.65) 2(-1.025,0) 3(-1.025,-0.65) 4(1.025,-0.65) 5(1.025,0) 6(1.025,0.65)
  rect 1x1.6 smd paste-2: 7(0,0)
  silkscreen extent -2.01,-1.13 1,1.13, body extent -1,-1 1,1, height 0.8
"STACKPOLE CSR1206" [mm] "Chip Resistor, 2-Leads, Body 3.13x1.55mm, IPC Medium Density"
  rect 1.15x1.7 smd: 1(-1.575,0) 2(1.575,0)
  silkscreen extent -2.4,-1.1 2.4,1.1, body extent -1.6,-0.78 1.6,0.77, height 0.55
"STACKPOLE CSR2512" [mm] "Chip Resistor, 2-Leads, Body 6.40x3.20mm, IPC Medium Density"
  rect 1.6x3.1 smd: 1(-3.25,0) 2(3.25,0)
  silkscreen extent -4.3,-1.8 4.3,1.8, body extent -3.27,-1.6 3.28,1.6, height 0.5
"TE TLRP 2512" [mm] "Chip Resistor, 2-Leads, Body 6.35x3.18mm, IPC Medium Density"
  rect 2x3.5 smd: 1(-3,0) 2(3,0)
  silkscreen extent -4.3,-2 4.3,2, body extent -3.27,-1.6 3.28,1.6, height 0.5
XCVR_ESP32-P4_MODULE [mm]
  rect 1.5x0.7 smd paste+0 mask+0.102: 1(-12.5,10.5) 2(-12.5,9.5) 3(-12.5,8.5) 4(-12.5,7.5) 5(-12.5,6.5) 6(-12.5,5.5) 7(-12.5,4.5) 8(-12.5,3.5) 9(-12.5,2.5) 10(-12.5,1.5) 11(-12.5,0.5) 12(-12.5,-0.5) 13(-12.5,-1.5) 14(-12.5,-2.5) 15(-12.5,-3.5) 16(-12.5,-4.5) 17(-12.5,-5.5) 18(-12.5,-6.5) 19(-12.5,-7.5) 20(-12.5,-8.5) 21(-12.5,-9.5) 22(-12.5,-10.5) 45(12.5,-10.5) 46(12.5,-9.5) 47(12.5,-8.5) 48(12.5,-7.5) 49(12.5,-6.5) 50(12.5,-5.5) 51(12.5,-4.5) 52(12.5,-3.5) 53(12.5,-2.5) 54(12.5,-1.5) 55(12.5,-0.5) 56(12.5,0.5) 57(12.5,1.5) 58(12.5,2.5) 59(12.5,3.5) 60(12.5,4.5) 61(12.5,5.5) 62(12.5,6.5) 63(12.5,7.5) 64(12.5,8.5) 65(12.5,9.5) 66(12.5,10.5)
  rect 0.7x1.5 smd paste+0 mask+0.102: 23(-10.5,-12.5) 24(-9.5,-12.5) 25(-8.5,-12.5) 26(-7.5,-12.5) 27(-6.5,-12.5) 28(-5.5,-12.5) 29(-4.5,-12.5) 30(-3.5,-12.5) 31(-2.5,-12.5) 32(-1.5,-12.5) 33(-0.5,-12.5) 34(0.5,-12.5) 35(1.5,-12.5) 36(2.5,-12.5) 37(3.5,-12.5) 38(4.5,-12.5) 39(5.5,-12.5) 40(6.5,-12.5) 41(7.5,-12.5) 42(8.5,-12.5) 43(9.5,-12.5) 44(10.5,-12.5) 67(10.5,12.5) 68(9.5,12.5) 69(8.5,12.5) 70(7.5,12.5) 71(6.5,12.5) 72(5.5,12.5) 73(4.5,12.5) 74(3.5,12.5) 75(2.5,12.5) 76(1.5,12.5) 77(0.5,12.5) 78(-0.5,12.5) 79(-1.5,12.5) 80(-2.5,12.5) 81(-3.5,12.5) 82(-4.5,12.5) 83(-5.5,12.5) 84(-6.5,12.5) 85(-7.5,12.5) 86(-8.5,12.5) 87(-9.5,12.5) 88(-10.5,12.5)
  silkscreen extent -13.85,-12.5 12.5,12.5, body extent -12.5,-12.5 12.5,12.5, height 3.3
XDCR_PRO-OB-440 [mm]
  rect 1.5x1.2 smd: 1(1.865,4.225) 2(1.865,2.025) 3(-1.865,4.225) 4(-1.865,-6.475)
  Keep-Out Layer region: -0.565,3.1 -3.165,3.1 -3.165,5.35 -0.565,5.35
  Keep-Out Layer region: -0.465,-7.7 -3.265,-7.7 -3.265,-5.25 -0.465,-5.25
  Keep-Out Layer region: 2.915,1.125 1.865,1.125 1.865,1.425 2.615,1.425 2.615,2.625 1.865,2.625 1.865,2.925 2.915,2.925
  Keep-Out Layer region: -1.865,4.825 -2.615,4.825 -2.615,3.625 -1.865,3.625 -1.865,3.1 -3.165,3.1 -3.165,5.35 -1.865,5.35
  Keep-Out Layer region: -0.565,3.1 -1.865,3.1 -1.865,3.625 -1.115,3.625 -1.115,4.825 -1.865,4.825 -1.865,5.35 -0.565,5.35
  Keep-Out Layer region: -1.865,-5.875 -2.615,-5.875 -2.615,-7.075 -1.865,-7.075 -1.865,-7.7 -3.265,-7.7 -3.265,-5.25 -1.865,-5.25
  Keep-Out Layer region: -0.465,-7.7 -1.865,-7.7 -1.865,-7.075 -1.115,-7.075 -1.115,-5.875 -1.865,-5.875 -1.865,-5.25 -0.465,-5.25
  silkscreen extent -2.62,-6.88 3.35,6.88, body extent -2.61,-6.88 2.61,6.88, height 3.53

## Part data
BOOT DOWN OK RST UP: library part CMP-1455-00006-5, "Switch Tactile Spst-no 0.05A 12V", Current Rating=50mA, Insulation Resistance=100MΩ, Max Operating Temperature=85°C, Min Operating Temperature=-40°C, Voltage Rating=12V, Actuator Material="Liquid Crystal Polymer, Polymer", Contact Plating=Silver, Height=3.5mm, Illumination Type=Non-Illuminated, Mechanical Life=500kcycles, Mount="Surface Mount", packaging="Tape and Reel", RoHS=Compliant, Switch Function=Off-Mom, Switch Travel=250µm, Throw Configuration=SPST
C1 C2 C3 C5 C6 C17 C35 C41 C51 C52 C53 C54 C55 C56 C57 C58 C59 C60 C80 C83 C91 C98: library part GMC10X7R105M50NT, "SMT Capacitor", Device Package="0603 (1608 Metric)", manufacturer="Cal-Chip Electronics, Inc.", Operating Temperature="-55°C ~ 125°C", Supplier Part Number 1=4713-GMC10X7R105M50NTCT-ND, Temperature Coefficient=X7R, Tolerance=±20%, Voltage - Rated=50V, Applications="General Purpose", Capacitance="1 µF", componentlink1description=Datasheet, componentlink1url=https://calchip.com/wp-content/uploads/2024/02/gmc_series-1.pdf, componentlink2description="DigiKey Link", componentlink2url=https://www.digikey.com/en/products/detail/cal-chip-electronics-inc/GMC10X7R105M50NT/25323876, lastupdated="06/04/2026 19:17:52", Lifecycle Status=Active, Minimum Order=1, Mounting Type="Surface Mount, MLCC", Package / Case="0603 (1608 Metric)", packaging=TapeAndReel, Part Number=GMC10X7R105M50NT, partid=65934, price=0.06, series=GMC, Size / Dimension="0.063\" L x 0.031\" W (1.60mm x 0.80mm)", Supplier 1=DigiKey, Thickness (Max)="0.037\" (0.95mm)"
C4 C9 C10 C11 C21 C22 C23 C24 C25 C26 C27 C28 C29 C30 C31 C32 C33 C36 C37 C38 C39 C40 C42 C43 C44 C50 C61 C62 C63 C64 C72 C74 C75 C79 C81 C82 C87 C88 C89 C90 C97: library part C0603C104M5RACTU, "SMT Capacitor", Device Package="0603 (1608 Metric)", manufacturer=KEMET, Operating Temperature="-55°C ~ 125°C", Supplier Part Number 1=399-C0603C104M5RACTUCT-ND, Temperature Coefficient=X7R, Tolerance=±20%, Voltage - Rated=50V, Applications="Bypass, Decoupling", Capacitance="0.1 µF", componentlink1description=Datasheet, componentlink1url=https://api.kemet.com/component-edge/download/datasheet/C0603C104M5RACTU.pdf, componentlink2description="DigiKey Link", componentlink2url=https://www.digikey.com/en/products/detail/kemet/C0603C104M5RACTU/2199782, lastupdated="06/04/2026 19:22:47", Lifecycle Status=Active, Minimum Order=1, Mounting Type="Surface Mount, MLCC", Package / Case="0603 (1608 Metric)", packaging=CutTape, Part Number=C0603C104M5RACTU, Part Status=Active, partid=69106, price=0.01, series="SMD Comm X7R", Size / Dimension="0.063\" L x 0.031\" W (1.60mm x 0.80mm)", Supplier 1=DigiKey, Thickness (Max)="0.034\" (0.87mm)"
C7: library part CGA5L3X8R2A334K160AB, "SMT Capacitor", Device Package="1206 (3216 Metric)", manufacturer="TDK Corporation", Operating Temperature="-55°C ~ 150°C", Ratings=AEC-Q200, Supplier Part Number 1=445-12977-1-ND, Temperature Coefficient=X8R, Tolerance=±10%, Voltage - Rated=100V, Applications=Automotive, Capacitance="0.33 µF", componentlink1description=Datasheet, componentlink1url=https://product.tdk.com/info/en/catalog/datasheets/mlcc_automotive_hightemp_en.pdf?ref_disty=digikey, componentlink2description="DigiKey Link", componentlink2url=https://www.digikey.com/en/products/detail/tdk-corporation/CGA5L3X8R2A334K160AB/3950213, Features="High Temperature", lastupdated="06/04/2026 19:37:59", Lifecycle Status=Active, Minimum Order=1, Mounting Type="Surface Mount, MLCC", Package / Case="1206 (3216 Metric)", packaging=TapeAndReel, Part Number=CGA5L3X8R2A334K160AB, Part Status=Active, partid=19758, price=0.15, series=CGA, Size / Dimension="0.126\" L x 0.063\" W (3.20mm x 1.60mm)", Supplier 1=DigiKey, Thickness (Max)="0.071\" (1.80mm)"
C8 C12 C14 C76 C84: library part GRM188C61C226ME01D, "SMT Capacitor", Device Package="0603 (1608 Metric)", manufacturer="Murata Electronics", Operating Temperature="-55°C ~ 85°C", Supplier Part Number 1=490-GRM188C61C226ME01DCT-ND, Temperature Coefficient=X5S, Tolerance=±20%, Voltage - Rated=16V, Applications="General Purpose", Capacitance="22 µF", componentlink1description=Datasheet, componentlink1url=https://search.murata.co.jp/Ceramy/image/img/A01X/G101/ENG/GRM188C61C226ME01-01A.pdf, componentlink2description="DigiKey Link", componentlink2url=https://www.digikey.com/en/products/detail/murata-electronics/GRM188C61C226ME01D/22528395, lastupdated="06/04/2026 19:18:15", Lifecycle Status=Active, Minimum Order=1, Mounting Type="Surface Mount, MLCC", Package / Case="0603 (1608 Metric)", packaging=TapeAndReel, Part Number=GRM188C61C226ME01D, partid=60294, price=0.08, series=GRM, Size / Dimension="0.063\" L x 0.031\" W (1.60mm x 0.80mm)", Supplier 1=DigiKey, Thickness (Max)="0.039\" (1.00mm)"
C13 C18: library part C0603C473K3RACAUTO, "CAP CER 0.047UF 25V X7R 0603", Capacitance="0.047 ÂµF", Device Package="0603 (1608 Metric)", manufacturer=KEMET, Operating Temperature="-55Â°C ~ 125Â°C", Ratings=AEC-Q200, Supplier Part Number 1=399-6899-1-ND, Temperature Coefficient=X7R, Tolerance=Â±10%, Voltage - Rated=25V, Applications="Automotive Bypass Decoupling", componentlink1description=Datasheet, componentlink1url=https://api.kemet.com/component-edge/download/datasheet/C0603C473K3RACAUTO.pdf, componentlink2description="DigiKey Link", componentlink2url=https://www.digikey.com/en/products/detail/kemet/C0603C473K3RACAUTO/3314894, lastupdated="2026-04-06 19:23:51.997000", Lifecycle Status=Active, Minimum Order=1, Mounting Type="Surface Mount MLCC", Package / Case="0603 (1608 Metric)", packaging=TapeAndReel, Part Number=C0603C473K3RACAUTO, Part Status=Active, partid=2309, price=0.01, series="SMD Auto X7R", Size / Dimension="0.063\ L x 0.031\ W (1.60mm x 0.80mm)", Supplier 1=DigiKey, Thickness (Max)="0.035\ (0.90mm)"
C15 C16 C19 C20: library part CGA4J1X7R1H475K125AC, "CAP CER 4.7UF 50V X7R 0805", Device Package="0805 (2012 Metric)", manufacturer="TDK Corporation", Operating Temperature="-55°C ~ 125°C", Ratings=AEC-Q200, Supplier Part Number 1=445-181404-1-ND, Temperature Coefficient=X7R, Tolerance=±10%, Voltage - Rated=50V, Applications=Automotive, Capacitance="4.7 µF", componentlink1description=Datasheet, componentlink1url=https://product.tdk.com/info/en/catalog/datasheets/mlcc_automotive_general_en.pdf?ref_disty=digikey, componentlink2description="DigiKey Link", componentlink2url=https://www.digikey.com/en/products/detail/tdk-corporation/CGA4J1X7R1H475K125AC/9742505, Features="Low ESL", lastupdated="2026-04-06 19:32:49.667000", Lifecycle Status=Active, Minimum Order=1, Mounting Type="Surface Mount MLCC", Package / Case="0805 (2012 Metric)", packaging=TapeAndReel, Part Number=CGA4J1X7R1H475K125AC, Part Status=Active, partid=44448, price=0.12, series=CGA, Size / Dimension="0.079\ L x 0.049\ W (2.00mm x 1.25mm)", Supplier 1=DigiKey, Thickness (Max)="0.059\ (1.50mm)"
C34: library part GMC21X7R225M35NT, "SMT Capacitor", Device Package="0805 (2012 Metric)", manufacturer="Cal-Chip Electronics, Inc.", Operating Temperature="-55°C ~ 125°C", Supplier Part Number 1=4713-GMC21X7R225M35NTCT-ND, Temperature Coefficient=X7R, Tolerance=±20%, Voltage - Rated=35V, Applications="General Purpose", Capacitance="2.2 µF", componentlink1description=Datasheet, componentlink1url=https://calchip.com/wp-content/uploads/2024/02/gmc_series-1.pdf, componentlink2description="DigiKey Link", componentlink2url=https://www.digikey.com/en/products/detail/cal-chip-electronics-inc/GMC21X7R225M35NT/25803563, lastupdated="06/04/2026 19:28:46", Lifecycle Status=Active, Minimum Order=1, Mounting Type="Surface Mount, MLCC", Package / Case="0805 (2012 Metric)", packaging=TapeAndReel, Part Number=GMC21X7R225M35NT, partid=69969, price=0.14, series=GMC, Size / Dimension="0.079\" L x 0.049\" W (2.00mm x 1.25mm)", Supplier 1=DigiKey, Thickness (Max)="0.057\" (1.45mm)"
C45 C46 C48 C49 C92 C93 C95 C96: library part UMK212BB7225KG-T, "SMT Capacitor", Device Package="0805 (2012 Metric)", manufacturer="Taiyo Yuden", Operating Temperature="-55°C ~ 125°C", Supplier Part Number 1=587-3169-1-ND, Temperature Coefficient=X7R, Tolerance=±10%, Voltage - Rated=50V, Applications="SMPS Filtering", Capacitance="2.2 µF", componentlink1description=Datasheet, componentlink1url=https://www.yuden.co.jp/productdata/catalog/mlcc01_e.pdf, componentlink2description="DigiKey Link", componentlink2url=https://www.digikey.com/en/products/detail/taiyo-yuden/UMK212BB7225KG-T/3194965, lastupdated="06/04/2026 19:33:11", Lifecycle Status=Active, Minimum Order=1, Mounting Type="Surface Mount, MLCC", Package / Case="0805 (2012 Metric)", packaging=TapeAndReel, Part Number=UMK212BB7225KG-T, Part Status=Active, partid=45972, price=0.06, series=M, Size / Dimension="0.079\" L x 0.049\" W (2.00mm x 1.25mm)", Supplier 1=DigiKey, Thickness (Max)="0.057\" (1.45mm)"